# Allegro board Chamber.brd
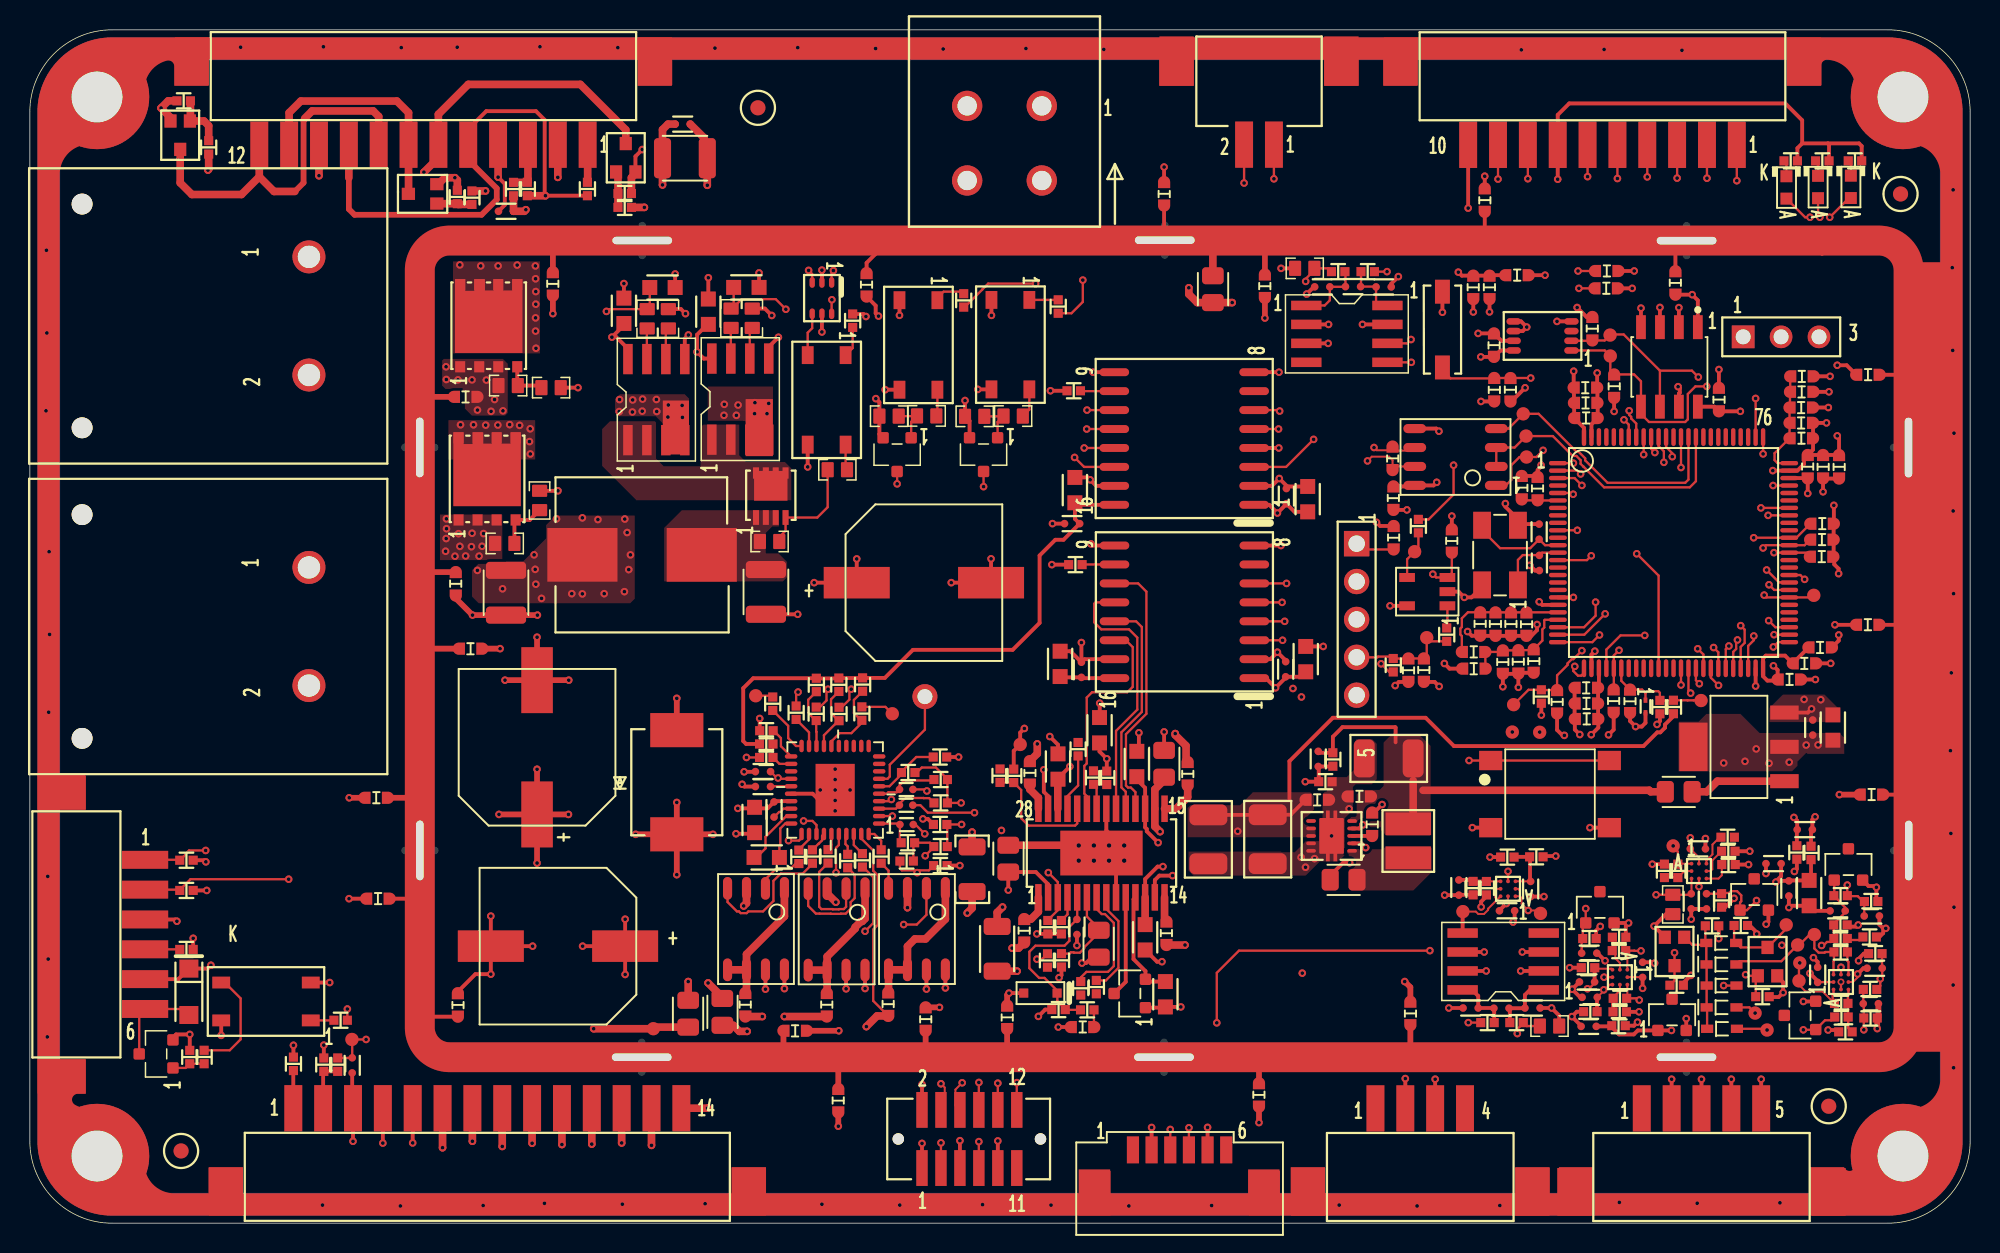
[diagram p0: board, top side]
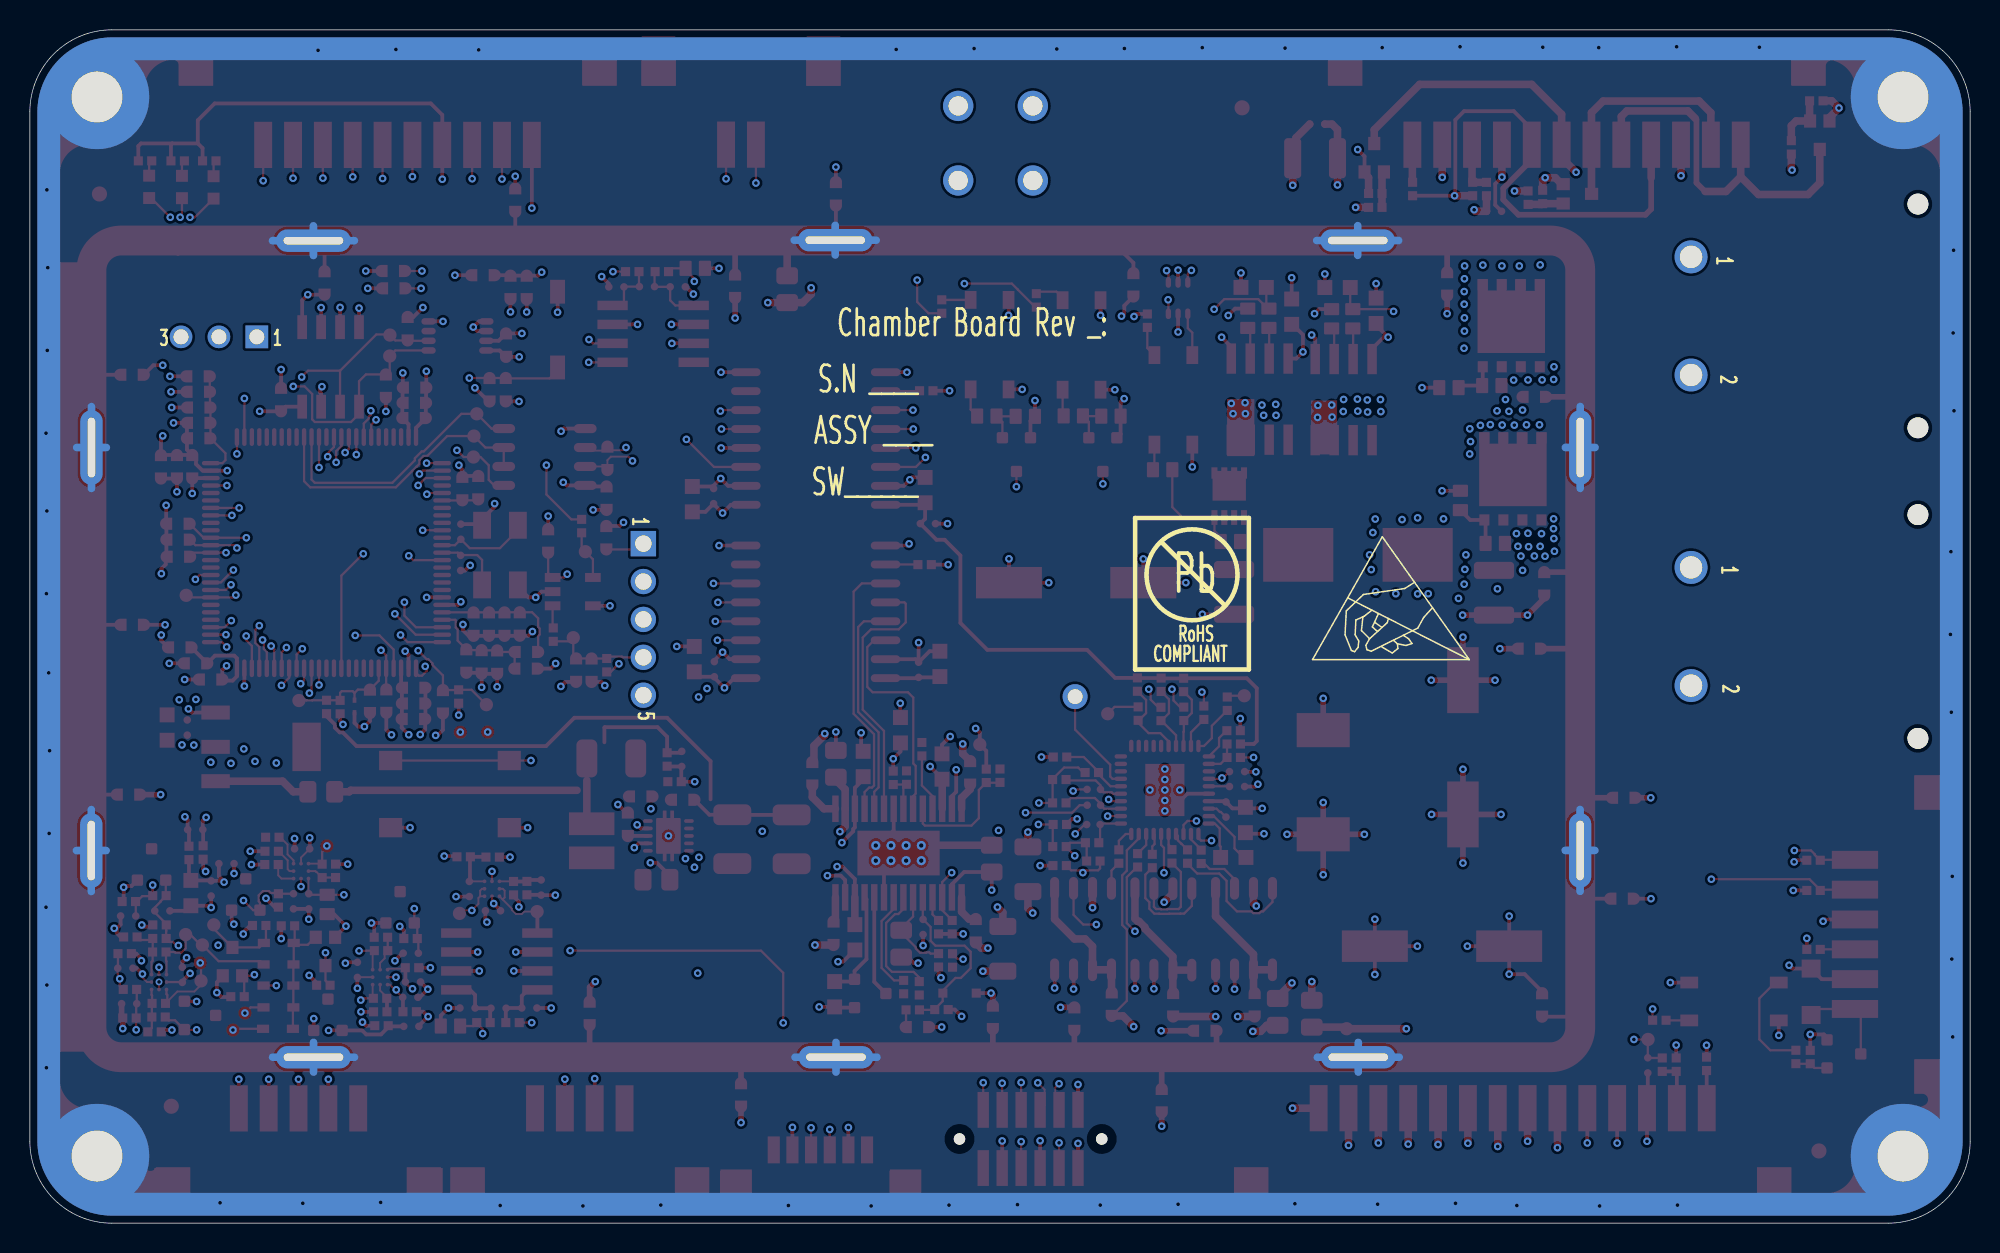
[diagram p1: board, bottom side, seen from below]

Outline 130 x 80 mm; copper layers: TOP, GND, SIG1, PWR, GND2, SIG2, GND3, BOTTOM. Coordinates in mm from the lower left corner of the outline.
Outline path: 0,74.5 arc(1.61,78.39) 5.5,80 124.5,80 arc(128.39,78.39) 130,74.5 130,5.5 arc(128.39,1.61) 124.5,0 5.5,0 arc(1.61,1.61) 0,5.5 0,74.5

## Design rules (mm)
constraint set DEFAULT: min track width 0.152
net group DP1: nets RS485A RS485B

## Placement (name value [footprint] x y rotation side)
C1  0.1uF  [CC_0402]  43.74 73.68 0 top
C2  10uF  [CC_1210]  43.89 71.39 0 top
C3  10nF  [SMD0603]  75.99 69.01 270 top
C4  10nF  [SMD0603]  97.48 68.58 270 top
C5  0.1uF  [CC_0402]  31.9 67.84 0 top
C6  10nF  [SMD0603]  110.25 63.03 90 top
C7  10nF  [SMD0603]  35.04 62.97 90 top
C8  10nF  [SMD0603]  56.06 62.91 90 top
C9  10nF  [SMD0603]  82.75 62.81 90 top
C10  0.47uF  [CC_0402]  88.65 62.79 180 top
C11  0.47uF  [CC_0402]  86.59 62.77 180 top
C12  0.47uF  [CC_0402]  90.7 62.77 180 top
C13  0.47uF  [CC_0603]  48.01 62.73 0 top
C14  1uF  [SMD0603]  96.71 62.73 90 top
C15  100n  [0603]  97.8 62.73 90 top
C16  0.47uF  [CC_0603]  42.38 62.73 0 top
C17  0.1uF  [CC_0603]  39.8 61.17 90 top
C18  0.1uF  [CC_0603]  45.46 61.1 90 top
C19  100n  [0603]  98.1 58.86 270 top
C20  10nF  [SMD0603]  123.15 56.88 0 top
C21  1uF  [SMD0603]  104.22 56.01 180 top
C22  10nF  [SMD0603]  29.2 55.39 180 top
C23  100n  [0603]  113.17 55.21 270 top
C24  100n  [0603]  104.24 54.99 180 top
C25  1uF  [SMD0603]  118.69 54.68 180 top
C26  10nF  [SMD0603]  104.26 53.98 0 top
C27  100n  [0603]  118.69 53.65 180 top
C28  10nF  [SMD0603]  118.69 52.62 0 top
C29  10nF  [SMD0603]  119.12 50.71 90 top
C30  100n  [0603]  120.14 50.71 270 top
C31  1uF  [SMD0603]  121.22 50.71 270 top
C32  100n  [0603]  99.96 49.31 270 top
C33  10nF  [SMD0603]  101.02 49.25 90 top
C34  10uF  [CC_0603]  70.02 49.14 90 top
C35  0.1uF  [CC_0402]  84.19 48.74 90 top
C36  100n  [0603]  91.36 48.6 90 top
C37  10uF  [CC_0603]  85.62 48.54 90 top
C38  0.1uF  [CC_0402]  69.83 46.9 180 top
C39  12pF  [CC_0402]  101.12 46.35 90 top
C40  12pF  [CC_0402]  101.14 44.26 270 top
C41  100UF  [EEE-1JA101P]  59.9 42.94 0 top
C42  10nF  [SMD0603]  28.54 42.86 90 top
C43  10uF  [CC_1210]  49.32 42.32 270 top
C44  10uF  [CC_1210]  31.9 42.26 270 top
C45  1uF  [SMD0603]  98.2 40.16 90 top
C46  100n  [0603]  99.24 40.16 90 top
C47  10nF  [SMD0603]  100.27 40.16 270 top
C48  10nF  [SMD0603]  123.14 40.11 0 top
C49  1uF  [SMD0603]  119.95 38.6 180 top
C50  10nF  [SMD0603]  29.53 38.51 180 top
C51  10uF  [CC_0603]  85.48 37.81 90 top
C52  10nF  [SMD0603]  100.76 37.69 270 top
C53  100n  [0603]  99.73 37.63 90 top
C54  1uF  [SMD0603]  98.69 37.61 90 top
C55  100n  [0603]  118.9 37.53 180 top
C56  10uF  [CC_0603]  69.03 37.49 90 top
C57  0.1uF  [CC_0402]  84.14 37.14 90 top
C58  0.1uF  [CC_0402]  70.45 37.1 90 top
C59  100n  [0603]  93.4 37.07 90 top
C60  10nF  [SMD0603]  117.89 36.45 0 top
C61  10nF  [SMD0603]  104.28 35.89 180 top
C62  100n  [0603]  106.12 35 90 top
C63  100n  [0603]  107.21 34.98 90 top
C64  1uF  [SMD0603]  104.29 34.84 0 top
C65  100n  [0603]  104.3 33.8 0 top
C66  0.1uF  [CC_0402]  119.45 33.23 270 top
C67  10uF  [CC_0603]  120.8 33.23 270 top
C68  10uF  [CC_0603]  71.67 33.05 90 top
C69  100UF  [EEE-1JA101P]  33.98 31.9 90 top
C70  0.1uF  [CC_0805]  76 30.79 90 top
C71  0.1uF  [CC_0603]  74.17 30.78 90 top
C72  0.1uF  [CC_0603]  68.88 30.61 90 top
C73  0.1uF  [CC_0402]  49.12 30.27 0 top
C74  0.1uF  [CC_0402]  49.12 29.27 0 top
C75  10nF  [SMD0603]  123.39 28.73 0 top
C76  10nF  [SMD0603]  23.21 28.52 0 top
C77  1uF  [CC_0402]  49.86 27.73 270 top
C78  0.1uF  [CC_0603]  48.56 27.03 270 top
C79  0.1uF  [CC_0402]  118.92 26.38 180 top
C80  0.1uF  [CC_0402]  111.76 25.09 0 top
C81  0.1uF  [CC_0603]  49.37 24.52 180 top
C82  0.1uF  [CC_0805]  65.55 24.44 90 top
C83  10nF  [CC_0402]  116.83 24.1 180 top
C84  0.1uF  [CC_0402]  95.74 22.5 270 top
C85  0.1uF  [CC_0402]  117.85 22.44 270 top
C86  0.1uF  [CC_0402]  100.55 22.4 270 top
C87  10uF  [CC_0603]  119.21 22.13 270 top
C88  10nF  [SMD0603]  23.32 21.75 0 top
C89  0.1uF  [CC_0402]  111.31 21.58 270 top
C90  0.1uF  [CC_0402]  112.34 21.58 270 top
C91  0.1uF  [CC_0402]  98.97 20.94 0 top
C92  0.1uF  [CC_0402]  121.12 20.94 180 top
C93  0.1uF  [CC_0402]  123.41 20.59 0 top
C94  3300pF  [CC_0402]  70.15 19.86 270 top
C95  0.1uF  [CC_0603]  74.72 19.16 270 top
C96  47uF  [CC_0805]  71.62 18.74 270 top
C97  100UF  [EEE-1JA101P]  35.38 18.57 180 top
C98  10uF  [CC_1206]  64.81 18.39 270 top
C99  0.1uF  [CC_0402]  104.48 18.1 0 top
C100  0.1uF  [CC_0402]  123.6 17.09 180 top
C101  0.1uF  [CC_0402]  108.05 16.98 90 top
C102  0.1uF  [CC_0402]  119.78 16.65 90 top
C103  0.1uF  [CC_0402]  104.33 16.17 180 top
C104  0.22uF  [CC_0603]  76.08 15.35 270 top
C105  0.1uF  [CC_0402]  104.51 15.14 180 top
C106  0.1uF  [CC_0402]  123.34 14.71 0 top
C107  10nF  [SMD0603]  28.68 14.63 270 top
C108  0.47uF  [CC_0402]  96.53 14.42 0 top
C109  0.47uF  [CC_0402]  100.68 14.42 0 top
C110  0.47uF  [CC_0402]  98.6 14.41 0 top
C111  10nF  [SMD0603]  92.49 14.06 270 top
C112  10nF  [SMD0603]  65.48 13.8 270 top
C113  10nF  [SMD0603]  60.02 13.68 270 top
C114  0.1uF  [CC_0402]  104.44 13.19 180 top
C115  10nF  [SMD0603]  51.28 12.9 180 top
C116  0.1uF  [CC_0402]  21.6 10.58 90 top
C117  10nF  [SMD0603]  82.35 8.6 90 top
C118  10nF  [SMD0603]  54.17 8.21 90 top
CBIAS1  10nF  [SMD0603]  89.07 28.61 0 top
CBOOT1  100nF  [0805]  88.02 23.03 0 top
CFF1  47pF  [CC_0402]  86.32 31.12 270 top
CIN1  4.7uF  [1210]  78.96 25.73 270 top
CIN_1  4.7uF  [1210]  82.94 25.74 270 top
CINX1  100nF  [0603]  86.26 28.38 180 top
COUT1  22uF  [1210]  91.04 31.16 180 top
CVCC1  1uF  [0603]  89.93 26.74 270 top
D1  LO L29K-H2L1-24-Z  [LED0603]  122.01 69.47 270 top
D2  LO L29K-H2L1-24-Z  [LED0603]  119.81 69.46 270 top
D3  LO L29K-H2L1-24-Z  [LED0603]  117.69 69.44 270 top
D4  ESD9L3.3ST5G  [SOD923]  108.25 34.64 270 top
D5  SZ1.5SMC33AT3G  [DO-214AB]  43.35 29.56 90 top
D6  LM4040AEM3-3.0+T  [SOT23-3]  121.84 24.05 0 top
D7  LM4040AEM3-3.0+T  [SOT23-3]  115.53 22.03 0 top
D8  LM4040AEM3-3.0+T  [SOT23-3]  105.19 21.18 0 top
D9  1N4148WT  [SOT523F]  113.32 18.79 180 top
D10  1N4148WT  [SOT523F]  113.34 17.34 180 top
D11  1N4148WT  [SOT523F]  113.34 15.93 180 top
D12  MBR2H200SFT3G  [SOD-123F]  10.66 15.51 270 top
D13  MM3Z3V0ST1G  [SOD323]  67.71 15.42 180 top
D14  SBAV99LT3G  [SOT-23-3]  73.7 15.4 90 top
D15  1N4148WT  [SOT523F]  113.34 14.47 180 top
D16  LM4040AEM3-3.0+T  [SOT23-3]  110.03 13.97 0 top
D17  LM4040AEM3-3.0+T  [SOT23-3]  118.6 13.93 90 top
D18  1N4148WT  [SOT523F]  113.38 13.03 180 top
FED1  FEDUCIAL  [FED]  48.78 74.77 0 top
FED2  FEDUCIAL  [FED]  10.13 4.84 0 top
FED3  FEDUCIAL  [FED]  120.53 7.84 0 top
FED4  FEDUCIAL  [FED]  125.34 69 0 top
ISO1  LTV-356T  [4-SOP]  65.7 58.89 270 top
ISO2  LTV-356T  [4-SOP]  59.54 58.87 270 top
ISO3  LTV-356T  [4-SOP]  53.39 55.19 270 top
ISO4  LTV-356T  [4-SOP]  15.82 14.86 180 top
J1  HEADER 12  [DF3EA-12P-2H-51]  26.37 76.75 0 top
J2  HEADER 10  [DF3EA-10P-2H51]  103.37 76.74 0 top
J3  HEADER 5  [DF3EA-5P-2H51]  112 3.24 180 top
J4  TC in  [DF3EA-4P-2H51]  93.16 3.25 180 top
J5  TC_OUT  [DF3EA-2P-2H51]  82.35 76.75 0 top
J6  DF22-2P-7.92DS(36)  [DF22-2P-7_92DS36]  7.85 40 90 top
J7  Heater_out  [2834098-1]  67.8 74.9 180 top
J8  Heater_in  [DF22L-2P-7_92DS06]  7.85 60.82 90 top
J9  -  [20021221-00012C4LF]  62.95 5.64 0 top
J10  -  [61300311121]  114.79 59.42 0 top
J11  -  [61300511121]  88.89 45.55 0 top
J20  -  [53261-0671]  76.41 2.11 0 top
J21  DF3EA-6P-2H(51)  [DF3EA-6P-2H51]  3.27 19.36 90 top
J22  DF3EA-14P-2H(51)  [DF3EA-14P-2H51]  30.65 3.26 180 top
L1  600ohm@100MHz  [0603]  99.64 63.55 0 top
L2  -  [SPM10040XT-R18M]  41.02 44.8 0 top
L3  600ohm@100MHz  [0603]  96.75 37.18 180 top
L4  BLM18SG331TN1D  [BD_0603]  67 30.19 270 top
L5  BLM18SG331TN1D  [BD_0603]  77.57 30.13 270 top
L6  BLM15AG601SN1D  [BD_0402]  58.72 29.08 0 top
L7  BLM15AG601SN1D  [BD_0402]  58.71 28.02 0 top
L8  BLM15AG601SN1D  [BD_0402]  58.74 26.72 0 top
L9  4.7uH  [ME3220]  92.36 25.63 90 top
L10  BK1005HM601-T  [0402]  119.34 24.82 90 top
L11  BLM18SG331TN1D  [BD_0603]  66.62 19.6 90 top
L12  BLM18SG331TN1D  [BD_0603]  76.15 19.43 90 top
L13  BLM18SG331TN1D  [BD_0603]  57.51 14.68 90 top
L14  BLM18SG331TN1D  [BD_0603]  47.94 14.64 90 top
L15  BLM18SG331TN1D  [BD_0603]  53.4 14.64 90 top
L16  BLM18HG601SN1D  [BD_0603]  70.53 13.15 0 top
MH1  Mounting H  [THP3_4]  4.5 75.5 0 top
MH2  Mounting H  [THP3_4]  125.5 75.5 0 top
MH3  M HOLE2  [OVAL4X0_5]  76.04 65.9 0 top
MH4  M HOLE2  [OVAL4X0_5]  41.03 65.88 0 top
MH5  M HOLE2  [OVAL4X0_5]  111 65.87 0 top
MH6  M HOLE2  [OVAL4X0_5]  26.12 52 90 top
MH7  M HOLE2  [OVAL4X0_5]  125.87 52 90 top
MH8  M HOLE2  [OVAL4X0_5]  26.13 24.99 90 top
MH9  M HOLE2  [OVAL4X0_5]  125.88 24.98 90 top
MH10  M HOLE2  [OVAL4X0_5]  41 11.12 0 top
MH11  M HOLE2  [OVAL4X0_5]  75.99 11.12 0 top
MH12  M HOLE2  [OVAL4X0_5]  110.99 11.12 0 top
MH13  Mounting H  [THP3_4]  4.5 4.5 0 top
MH14  Mounting H  [THP3_4]  125.5 4.5 0 top
NOREF  -  []  0 0 0 top
NOREF#2  -  []  27.23 0 90 top
NOREF#3  -  []  0 15.84 0 top
NOREF#4  -  []  -10.16 -10.07 90 top
NOREF#5  -  []  -10.16 -10.07 0 top
NOREF#6  -  []  0 0 90 top
NOREF#7  -  []  52.14 43.46 180 bottom
NOREF#8  -  []  44.06 37.78 180 bottom
Q1  BSS123W  [SOT323]  10.07 72.94 180 top
Q2  BSS123W  [SOT323]  39.93 71.42 0 top
Q3  BSS123W  [SOT323]  26.31 69 90 top
Q4  CSD18504Q5A  [8-VSONP]  30.74 60.16 90 top
Q5  ZXMP6A13F  [SOT23]  63.9 51.52 180 top
Q6  ZXMP6A13F  [SOT23]  58.11 51.52 180 top
Q7  CSD18504Q5A  [8-VSONP]  30.63 49.9 90 top
Q8  SISS27DN-T1-GE3  [8-POWERVDFN]  49.64 48.8 90 top
Q9  BSS123W-7-F  [SOT323]  110.19 18.21 180 top
Q10  BSS123W-7-F  [SOT323]  116.43 17.53 0 top
Q11  IRLML2803TRPBF  [SOT23]  8.46 11.35 90 top
R1  10k  [CR_0402]  10.31 75.24 180 top
R2  470  [CR_0402]  11.98 72.12 90 top
R3  590  [CR_0402]  117.98 71.22 180 top
R4  590  [CR_0402]  122.28 71.22 180 top
R5  590  [CR_0402]  120.1 71.21 180 top
R6  4.7k  [CR_0402]  33.33 69.33 90 top
R7  332  [CR_0402]  37.36 69.33 90 top
R8  470  [CR_0402]  32.41 69.32 270 top
R9  10k  [CR_0402]  39.86 69.03 0 top
R10  10k  [CR_0402]  28.64 68.8 90 top
R11  470  [CR_0402]  29.62 68.75 270 top
R12  470  [CR_0402]  39.86 68.1 180 top
R13  1M  [CR_0603]  85.42 64.01 180 top
R14  10K  [SMD0603]  105.65 63.83 0 top
R15  10k  [CR_0402]  87.66 63.79 0 top
R16  10k  [CR_0402]  89.64 63.79 180 top
R17  10K  [SMD0603]  105.62 62.67 0 top
R18  0R  [CR_0805]  79.26 62.61 90 top
R19  422  [CR_0402]  62.57 61.86 90 top
R20  422  [CR_0402]  68.9 61.45 90 top
R21  1K  [CR_0603]  46.98 60.66 270 top
R22  10K  [CR_0603]  48.4 60.66 270 top
R23  1K  [CR_0603]  41.36 60.63 270 top
R24  10K  [CR_0603]  42.78 60.63 270 top
R25  422  [CR_0402]  55.13 60.5 90 top
R26  10K  [SMD0603]  104.69 59.96 90 top
R27  0R  [0603]  118.73 56.77 180 top
R28  4.7K  [CR_0603]  32.05 56.15 180 top
R29  10K  [SMD0603]  106.15 56.11 270 top
R30  4.7K  [CR_0603]  34.92 56.01 180 top
R31  40.2K  [SMD0603]  98.12 55.87 270 top
R32  0R  [0603]  99.2 55.87 90 top
R33  4.7k  [CR_0402]  69.94 55.8 180 top
R34  0R  [0603]  118.72 55.73 180 top
R35  4.7K  [CR_0603]  60.09 54.12 0 top
R36  4.7K  [CR_0603]  65.88 54.11 0 top
R37  4.7K  [CR_0603]  57.57 54.1 0 top
R38  4.7K  [CR_0603]  63.3 54.09 0 top
R39  120  [SMD0603]  91.3 51.27 270 top
R40  4.7K  [CR_0603]  54.1 50.51 0 top
R41  4.7K  [CR_0603]  34.15 48.45 270 top
R42  10K  [SMD0603]  120.08 46.89 0 top
R43  0R  [CR_0402]  93.03 46.73 90 top
R44  75R  [SMD0603]  91.38 45.95 90 top
R45  10K  [SMD0603]  120.07 45.82 0 top
R46  10K  [SMD0603]  95.27 45.73 90 top
R47  4.7K  [CR_0603]  49.56 45.7 0 top
R48  4.7K  [CR_0603]  31.82 45.57 180 top
R49  10K  [SMD0603]  120.05 44.68 0 top
R50  4.7k  [CR_0402]  70.05 44.15 180 top
R51  0R  [0603]  97.18 40.17 90 top
R52  470  [CR_0402]  94.93 39.45 270 top
R53  0R  [0603]  96.73 38.29 0 top
R54  470  [CR_0402]  91.35 37.4 90 top
R55  10K  [SMD0603]  92.36 37.07 270 top
R56  100k  [CR_0402]  55.79 36.11 90 top
R57  100k  [CR_0402]  54.2 36.09 90 top
R58  100k  [CR_0402]  52.69 36.08 90 top
R59  20k  [CR_0402]  101.27 35.31 270 top
R60  10K  [SMD0603]  102.32 34.95 270 top
R61  0R  [CR_0402]  49.77 34.82 90 top
R62  40.2k  [CR_0402]  110.12 34.6 90 top
R63  4.7k  [CR_0402]  109.21 34.6 270 top
R64  0R  [CR_0402]  51.34 34.22 90 top
R65  100R  [CR_0402]  55.75 34.16 270 top
R66  100R  [CR_0402]  52.68 34.15 270 top
R67  100R  [CR_0402]  54.21 34.14 270 top
R68  0R  [CR_0402]  49.35 33.01 180 top
R69  100k  [CR_0402]  49.34 32.12 180 top
R70  0R  [CR_0402]  70.23 31.77 270 top
R71  4.7k  [CR_0402]  60.98 31.25 0 top
R72  0R  [CR_0402]  49.34 31.22 180 top
R73  4.7k  [CR_0402]  58.85 30.21 0 top
R74  470R  [CR_0402]  65 30 270 top
R75  100k  [CR_0402]  65.92 29.99 90 top
R76  0R  [CR_0402]  71.26 29.87 270 top
R77  100k  [CR_0402]  72.15 29.86 90 top
R78  4.7k  [CR_0402]  61.03 29.74 0 top
R79  0R  [CR_0805]  110.47 28.92 0 top
R80  4.7k  [CR_0402]  61.03 28.17 0 top
R81  4.7k  [CR_0402]  60.99 26.73 180 top
R82  10k  [CR_0402]  113.75 25.87 0 top
R83  4.7k  [CR_0402]  58.83 25.5 0 top
R84  4.7k  [CR_0402]  61.02 25.25 180 top
R85  10k  [CR_0402]  113.8 24.94 0 top
R86  0R  [CR_0402]  118.39 24.85 90 top
R87  280R  [CR_0402]  53.48 24.59 270 top
R88  0R  [CR_0402]  57.04 24.58 90 top
R89  0R  [CR_0402]  52.43 24.58 90 top
R90  280R  [CR_0402]  51.52 24.56 270 top
R91  1.3k  [CR_0402]  100.93 24.56 0 top
R92  4.42k  [CR_0402]  98.99 24.54 0 top
R93  10k  [CR_0402]  10.49 24.33 180 top
R94  280R  [CR_0402]  55.78 24.32 270 top
R95  0R  [CR_0402]  54.8 24.28 90 top
R96  4.7k  [CR_0402]  58.75 24.28 0 top
R97  10k  [CR_0402]  113.81 24.04 180 top
R98  4.7k  [CR_0402]  61 23.97 0 top
R99  0.005R  [CR_1206]  63.13 23.73 90 top
R100  1M NC  [CR_0402]  109.52 23.62 270 top
R101  0R  [CR_0402]  110.42 23.62 90 top
R102  1.3k  [CR_0402]  96.7 22.46 270 top
R103  4.42k  [CR_0402]  97.59 22.46 90 top
R104  10k  [CR_0402]  10.49 22.31 180 top
R105  NC  [CR_0402]  121.32 21.96 0 top
R106  590  [CR_0402]  113.35 21.64 90 top
R107  10k  [CR_0402]  123.37 21.56 0 top
R108  4.99K  [CR_0603]  110.08 21.37 270 top
R109  590  [CR_0402]  121.31 19.99 180 top
R110  10k  [CR_0402]  114.63 19.96 180 top
R111  10k  [CR_0402]  112.71 19.93 0 top
R112  100k  [CR_0402]  68.2 19.84 270 top
R113  0R  [CR_0402]  69.12 19.84 90 top
R114  56k  [CR_0402]  123.27 19.19 0 top
R115  1M NC  [CR_0402]  106.48 19.17 180 top
R116  24k  [CR_0402]  121.32 19.09 0 top
R117  590  [CR_0402]  104.49 19.08 180 top
R118  4.7k  [CR_0402]  10.49 18.35 180 top
R119  0R  [CR_0402]  106.47 18.27 0 top
R120  680k  [CR_0402]  121.33 18.18 180 top
R121  590  [CR_0402]  123.65 18.07 0 top
R122  0R  [CR_0402]  69.12 17.62 270 top
R123  0R  [CR_0402]  68.18 17.61 90 top
R124  10k  [CR_0402]  104.4 17.12 180 top
R125  10k  [CR_0402]  110.34 15.95 180 top
R126  0R  [CR_0402]  71.46 15.83 90 top
R127  0R  [CR_0402]  70.41 15.75 90 top
R128  NC  [CR_0402]  123.29 15.67 180 top
R129  10k  [CR_0402]  116.09 15.18 180 top
R130  0R  [CR_0402]  106.54 15.07 0 top
R131  680k  [CR_0402]  121.36 14.73 180 top
R132  10k  [CR_0402]  68.92 14.32 180 top
R133  150k  [CR_0402]  70.85 14.3 180 top
R134  10k  [CR_0402]  104.55 14.18 180 top
R135  1M NC  [CR_0402]  106.52 14.17 180 top
R136  180R  [CR_0805]  46.4 14.16 90 top
R137  2K  [CR_0805]  44.11 14.04 270 top
R138  24k  [CR_0402]  121.38 13.82 0 top
R139  10k  [CR_0402]  123.32 13.75 0 top
R140  422  [CR_0402]  20.82 13.6 180 top
R141  10k  [CR_0402]  97.66 13.44 0 top
R142  10k  [CR_0402]  99.61 13.44 180 top
R143  590  [CR_0402]  106.44 13.24 180 top
R144  1M  [CR_0603]  101.82 13.22 0 top
R145  56k  [CR_0402]  121.64 12.82 180 top
R146  4.7k  [CR_0402]  11.68 11.14 270 top
R147  4.7k  [CR_0402]  10.71 11.14 90 top
R148  332  [CR_0402]  17.66 10.68 270 top
R149  4.7k  [CR_0402]  19.7 10.62 270 top
R150  470  [CR_0402]  20.63 10.62 90 top
RFBB1  37.4k  [0402]  86.8 29.6 0 top
RFBT1  100k  [0402]  87.3 31.08 270 top
SW1  -  [CHS-01TA]  94.64 59.91 0 top
SW2  -  [PTS645SM43SMTR92]  101.85 28.77 0 top
TP1  TEST POINT  [35MIL_SMT]  105.87 59.54 0 top
TP2  TEST POINT  [35MIL_SMT]  105.89 58.13 0 top
TP3  TEST POINT  [35MIL_SMT]  100.06 54.26 270 top
TP4  TEST POINT  [35MIL_SMT]  100.25 52.77 270 top
TP5  TEST POINT  [35MIL_SMT]  100.28 51.36 270 top
TP6  TEST POINT  [35MIL_SMT]  92.78 45.02 0 top
TP7  TEST POINT  [35MIL_SMT]  119.52 42.09 0 top
TP8  TEST POINT  [35MIL_SMT]  93.59 39.25 0 top
TP9  TEST POINT  [35MIL_SMT]  48.63 35.36 0 top
TP10  TP TH 1MM  [CR_1MM]  59.97 35.3 0 top
TP11  TEST POINT  [35MIL_SMT]  111.97 35.04 0 top
TP12  TEST POINT  [35MIL_SMT]  99.41 34.76 0 top
TP13  TEST POINT  [35MIL_SMT]  57.78 34.15 0 top
TP14  TEST POINT  [35MIL_SMT]  99.32 32.92 0 top
TP15  TEST POINT  [35MIL_SMT]  101.16 32.91 0 top
TP16  TEST POINT  [35MIL_SMT]  66.35 32.09 0 top
TP17  TEST POINT  [35MIL_SMT]  110.1 25.29 0 top
TP18  TEST POINT  [35MIL_SMT]  96.01 20.89 0 top
TP19  TEST POINT  [35MIL_SMT]  101.21 20.77 0 top
TP20  TEST POINT  [35MIL_SMT]  117.68 20 0 top
TP21  TEST POINT  [35MIL_SMT]  119.56 19.35 0 top
TP22  TEST POINT  [35MIL_SMT]  118.44 18.65 0 top
TP23  TEST POINT  [35MIL_SMT]  118.58 17.45 0 top
TP24  TEST POINT  [35MIL_SMT]  118.53 16.24 0 top
TP25  TEST POINT  [35MIL_SMT]  115.59 14.08 0 top
TP26  TEST POINT  [35MIL_SMT]  41.78 13.04 0 top
TP27  TEST POINT  [35MIL_SMT]  116.39 12.95 0 top
TP28  TEST POINT  [35MIL_SMT]  21.58 12.32 0 top
U1  SN74LVC1G10DCKR  [SC-70-6]  53.07 62.01 180 top
U2  AD8495CRMZ-R7  [SO8]  88.24 59.62 0 top
U3  LM75BDP,118  [TSSOP-8]  101.35 59.48 180 top
U4  FT24C64A-USG-T  [SOP-8]  109.85 57.4 180 top
U5  ACS722LLCTR-10AU-T  [SO8]  47.6 55.24 90 top
U6  ACS722LLCTR-10AU-T  [SO8]  41.98 55.21 90 top
U7  ISOW7842  [16-SOICW]  77.34 52.6 90 top
U8  ST1480  [8-SOIC]  95.52 51.36 180 top
U9  STM32L073  [LQFP100]  110.13 44.95 0 top
U10  ADM6320CZ29ARJZ-R7  [SOT23-5]  93.63 42.34 0 top
U11  ISOW7841  [SOIC16W]  77.36 40.98 90 top
U12  MCP1826S-3302E/DB  [SOT223-3]  114.51 31.93 90 top
U13  DRV8307RHAR  [40-VQFN_6X6]  53.95 29.04 180 top
U14  LM53601AQDSXRQ1  [DSX0010A]  87.22 25.96 180 top
U15  L6470H  [28-TSSOP]  71.8 24.81 0 top
U16  LM2904ITPX/NOPB  [8-DSBGA]  111.83 23.6 0 top
U17  LM2904ITPX/NOPB  [8-DSBGA]  99.04 22.42 180 top
U18  CSD88537ND  [SO-8]  48.65 19.72 270 top
U19  CSD88537ND  [SO-8]  59.44 19.72 270 top
U20  CSD88537ND  [SO-8]  54.05 19.7 270 top
U21  AD8495CRMZ-R7  [SO8]  98.71 17.54 180 top
U22  LM2904ITPX/NOPB  [8-DSBGA]  106.53 16.49 270 top
U23  LM2904ITPX/NOPB  [8-DSBGA]  121.35 16.16 90 top
Y1  ABM3B-20.000MHZ-B2-T  [ABM3B-20_000MHZ-B2-T]  98.5 44.79 90 top

## Library data of the parts
C1 C2 C10-C13 C16-C18 C34 C35 C37-C40 C43 C44 C51 C56-C58 C66 C67 C79 C80 C83-C87 C89-C93 C99-C103 C105 C106 C108-C110 C114 CFF1 = C_0603
C3 C4 C6-C9 C20 C22 C26 C28 C29 C33 C42 C47 C48 C50 C52 C60 C61 C75 C76 C88 C107 C111-C113 C115 C117 C118 = CAP NP
C5 C73 C74 C77 C78 C81 C116 = C_0603: room: BLDC_SPARE
C14 C21 C25 C31 C45 C49 C54 C64 = capacitor
C15 C19 C23 C24 C27 C30 C32 C36 C46 C53 C55 C59 C62 C63 C65 = CAP NP_0
C41 = C: room: Step_Dri_Linear
C68 C70-C72 C82 C94-C96 C98 C104 = C_0603: room: Step_Dri_Linear
C69 C97 = C: room: BLDC_SPARE
CBIAS1 = GRM033R61A103KA01D
CBOOT1 = C0805C104K5RACTU
CIN1 CIN_1 = GRM32ER71H475KA88L
CINX1 = C0603C104K5RACTU
COUT1 = GRM32ER61C226ME20L
CVCC1 = C0603C105Z8VACTU
D1-D3 = DIO_LED_B_0
D4 = DIODE TS_0
D5 = DIODE SCHOTTKY_1: room: BLDC_SPARE
D6-D8 D16 D17 = UT4020_1
D9-D11 D15 D18 = 1N4148WT
D12 = 120NQ045_0
D13 = MM3Z3V3ST1G: room: MCU
D14 = BAV99L_0: room: Step_Dri_Linear
FED1-FED4 = FEDUCIAL
ISO1-ISO4 = OPTO ISOLATOR-A_0
J1 = HEADER 12
J2 = HEADER 10
J3 = HEADER 5
J4 = HEADER 4
J5-J8 = HEADER 2
J9 = HEADER 6X2
J10 = HEADER 3/SM
J11 = CON5
J20 J21 = HEADER 6
J22 = CONN FLEX 14
L1 L3 = BEAD_0
L2 = INDUCTOR
L4-L8 L10-L15 = BEAD
L9 = ME3220-472MLB
L16 = BEAD: room: TEMP_SNS
MH1 MH2 MH13 MH14 = M HOLE1_0
MH3-MH12 = M HOLE2_0
Q1-Q3 Q9 Q10 = BSS123W-7-F
Q4 Q7 = IRF7201/SO_1
Q5 Q6 = ZVP4424/TO_0
Q8 = DI9435/SO_1
Q11 = VN0610LL_0
R1-R13 R15 R16 R18-R25 R28 R30 R33 R35-R38 R40 R41 R43 R47 R48 R50 R52 R54 R59 R62 R63 R71 R73 R78-R86 R91-R93 R96-R98 R100-R111 R114-R121 R124 R125 R128-R131 R134-R150 = Resistor_Small
R14 R17 R26 R27 R29 R31 R32 R34 R39 R42 R44-R46 R49 R51 R53 R55 R60 = R
R56-R58 R61 R64-R69 R72 R87-R90 R94 R95 R99 = Resistor_Small: room: BLDC_SPARE
R70 R74-R77 R112 R113 R122 R123 R126 R127 R132 R133 = Resistor_Small: room: Step_Dri_Linear
RFBB1 = CRCW040237K4FKED
RFBT1 = CRCW0402100KFKED
SW1 = SW SLIDE-SPST
SW2 = SW_TC_SPST
TP1-TP15 TP17-TP28 = TP_35MIL_SMT: room: BLDC_SPARE
TP16 = TP_35MIL_SMT: room: Step_Dri_Linear
U1 = SN74LVC1G10DCKR
U2 U21 = AD8495CRMZ-R7
U3 = LM75BDP,118
U4 = FT24C64A-USG-T
U5 U6 = ACS723LLCTR-10AU-T2_0
U7 = ISOW7842_0
U8 = LTC1485_0
U9 = STM32L073_2
U10 = ADM6320CZ29ARJZ-R7_1
U11 = ISOW7841_0
U12 = TCL1117/DD_3
U13 = STSPIN32F0_27: room: BLDC_SPARE
U14 = LM53601AQDSXRQ1_0
U15 = L6470H_13: room: Step_Dri_Linear
U16 U17 U22 U23 = LM387_0
U18-U20 = DRV8806_4: room: BLDC_SPARE
Y1 = CRYSTAL1-4/SM_0

## Footprints (pads in the part's own frame, mm; a bottom-side part is the same pattern mirrored in y, then rotated)
4-SOP
  rect 1.194x0.787 smd: 1(-3,1.27) 2(-3,-1.27) 3(3,-1.27) 4(3,1.27)
8-DSBGA
  round 0.254 smd: A1(-0.5,0.5) A2(0,0.5) A3(0.5,0.5) B1(-0.5,0) B3(0.5,0) C1(-0.5,-0.5) C2(0,-0.5) C3(0.5,-0.5)
8-POWERVDFN
  rect 0.991x0.406 smd: 1(-1.492,0.991) 2(-1.492,0.33) 3(-1.492,-0.33) 4(-1.492,-0.991)
  rect 0.762x0.406 smd: 5(1.492,-0.991) 6(1.492,-0.33) 7(1.492,0.33) 8(1.492,0.991)
8-SOIC
  oval 1.524x0.61 smd: 1(-2.731,1.905) 2(-2.731,0.635) 3(-2.731,-0.635) 4(-2.731,-1.905) 5(2.731,-1.905) 6(2.731,-0.635) 7(2.731,0.635) 8(2.731,1.905)
8-VSONP
  rect 0.75x0.675 smd: 1(-2.752,1.913) 2(-2.752,0.637) 3(-2.752,-0.637) 4(-2.752,-1.913) 5(2.752,-1.913) 6(2.752,-0.637) 7(2.752,0.637) 8(2.752,1.913)
16-SOICW
  oval 0.53x1.98 smd: 1(-4.445,-4.685) 2(-3.175,-4.685) 3(-1.905,-4.685) 4(-0.635,-4.685) 5(0.635,-4.685) 6(1.905,-4.685) 7(3.175,-4.685) 8(4.445,-4.685) 9(4.445,4.685) 10(3.175,4.685) 11(1.905,4.685) 12(0.635,4.685) 13(-0.635,4.685) 14(-1.905,4.685) 15(-3.175,4.685) 16(-4.445,4.685)
28-TSSOP
  rect 0.432x1.778 smd: 1(-4.227,-2.97) 2(-3.576,-2.97) 3(-2.926,-2.97) 4(-2.276,-2.97) 5(-1.626,-2.97) 6(-0.975,-2.97) 7(-0.325,-2.97) 8(0.325,-2.97) 9(0.975,-2.97) 10(1.626,-2.97) 11(2.276,-2.97) 12(2.926,-2.97) 13(3.576,-2.97) 14(4.227,-2.97) 15(4.227,2.97) 16(3.576,2.97) 17(2.926,2.97) 18(2.276,2.97) 19(1.626,2.97) 20(0.975,2.97) 21(0.325,2.97) 22(-0.325,2.97) 23(-0.975,2.97) 24(-1.626,2.97) 25(-2.276,2.97) 26(-2.926,2.97) 27(-3.576,2.97) 28(-4.227,2.97)
  rect 5.512x2.997 smd: 29(0,0)
35MIL_SMT
  round 0.889 smd: 1(0,0)
40-VQFN_6X6
  oval 0.838x0.292 smd: 1(-2.95,2.25) 2(-2.95,1.75) 3(-2.95,1.25) 4(-2.95,0.75) 5(-2.95,0.25) 6(-2.95,-0.25) 7(-2.95,-0.75) 8(-2.95,-1.25) 9(-2.95,-1.75) 10(-2.95,-2.25) 21(2.95,-2.25) 22(2.95,-1.75) 23(2.95,-1.25) 24(2.95,-0.75) 25(2.95,-0.25) 26(2.95,0.25) 27(2.95,0.75) 28(2.95,1.25) 29(2.95,1.75) 30(2.95,2.25)
  oval 0.292x0.838 smd: 11(-2.25,-2.95) 12(-1.75,-2.95) 13(-1.25,-2.95) 14(-0.75,-2.95) 15(-0.25,-2.95) 16(0.25,-2.95) 17(0.75,-2.95) 18(1.25,-2.95) 19(1.75,-2.95) 20(2.25,-2.95) 31(2.25,2.95) 32(1.75,2.95) 33(1.25,2.95) 34(0.75,2.95) 35(0.25,2.95) 36(-0.25,2.95) 37(-0.75,2.95) 38(-1.25,2.95) 39(-1.75,2.95) 40(-2.25,2.95)
  rect 2.62x3.5 smd: 41(0,0)
0402
  rect 0.61x0.61 smd: 1(-0.45,0) 2(0.45,0)
0603
  custom 0.813x0.813 smd: 1(0.787,0) 2(-0.787,0)
0805
  custom 1.143x1.448 smd: 1(-0.899,0) 2(0.899,0)
1210
  custom 1.397x2.54 smd: 1(-1.638,0) 2(1.638,0)
53261-0671
  rect 2.1x3 smd: (-5.05,-0.1) (6.3,-0.1)
  rect 0.813x1.803 smd: 1(-2.5,2.8) 2(-1.25,2.8) 3(0,2.8) 4(1.25,2.8) 5(2.5,2.8) 6(3.75,2.8)
2834098-1
  round 2.032 hole 1.295: (0,5) (5,5) 1(0,0) 2(5,0)
20021221-00012C4LF
  round 0.762 hole 1.016 unplated: (-4.765,0) (4.765,0)
  rect 0.762x2.4 smd: 1(-3.175,-1.95) 2(-3.175,1.95) 3(-1.905,-1.95) 4(-1.905,1.95) 5(-0.635,-1.95) 6(-0.635,1.95) 7(0.635,-1.95) 8(0.635,1.95) 9(1.905,-1.95) 10(1.905,1.95) 11(3.175,-1.95) 12(3.175,1.95)
61300311121
  rect 1.524x1.524 hole 1: 1(0,0)
  round 1.52 hole 1: 2(2.54,0) 3(5.08,0)
61300511121
  rect 1.702x1.702 hole 1.1: 1(0,0)
  round 1.7 hole 1.1: 2(0,-2.54) 3(0,-5.08) 4(0,-7.62) 5(0,-10.16)
ABM3B-20_000MHZ-B2-T
  rect 1.803x1.194 smd: 1(-2,-1.2) 2(2,-1.2) 3(2,1.2) 4(-2,1.2)
BD_0402
  round 0.508 smd: 1(-0.45,0) 2(0.45,0)
BD_0603
  custom 0.813x0.813 smd: 1(0.787,0) 2(-0.787,0)
CC_0402
  round 0.508 smd: 1(-0.508,0) 2(0.508,0)
CC_0603
  rect 1x1 smd: 1(-0.85,0) 2(0.85,0)
CC_0805
  custom 1.143x1.448 smd: 1(-0.899,0) 2(0.899,0)
CC_1206
  custom 1.143x1.803 smd: 1(-1.499,0) 2(1.499,0)
CC_1210
  custom 1.143x2.692 smd: 1(-1.5,0) 2(1.5,0)
CHS-01TA
  rect 1x1.6 smd: 1(0,2.54) 2(0,-2.54)
CR_1MM
  round 1.676 hole 1: 1(0,0)
CR_0402
  rect 0.61x0.61 smd: 1(-0.45,0) 2(0.45,0)
CR_0603
  custom 0.813x1.016 smd: 1(-0.648,0) 2(0.648,0)
CR_0805
  custom 1.143x1.448 smd: 1(-0.899,0) 2(0.899,0)
CR_1206
  custom 1.143x1.803 smd: 1(-1.499,0) 2(1.499,0)
DF3EA-2P-2H51
  rect 2.3x3.3 smd: (-5.52,1.15) (5.52,1.15)
  rect 1.2x3.099 smd: 1(1,-4.45) 2(-1,-4.45)
DF3EA-4P-2H51
  rect 2.286x3.2 smd: (-7.52,1.15) (7.52,1.15)
  rect 1.2x3.099 smd: 1(3,-4.45) 2(1,-4.45) 3(-1,-4.45) 4(-3,-4.45)
DF3EA-5P-2H51
  rect 2.286x3.2 smd: (-8.52,1.15) (8.52,1.15)
  rect 1.2x3.099 smd: 1(4,-4.45) 2(2,-4.45) 3(0,-4.45) 4(-2,-4.45) 5(-4,-4.45)
DF3EA-6P-2H51
  rect 2.286x3.2 smd: (-9.52,1.15) (9.52,1.15)
  rect 1.2x3.099 smd: 1(5,-4.45) 2(3,-4.45) 3(1,-4.45) 4(-1,-4.45) 5(-3,-4.45) 6(-5,-4.45)
DF3EA-10P-2H51
  rect 2.286x3.2 smd: (-11.52,1.15) (15.52,1.15)
  rect 1.2x3.099 smd: 1(11,-4.45) 2(9,-4.45) 3(7,-4.45) 4(5,-4.45) 5(3,-4.45) 6(1,-4.45) 7(-1,-4.45) 8(-3,-4.45) 9(-5,-4.45) 10(-7,-4.45)
DF3EA-12P-2H-51
  rect 2.286x3.2 smd: (-15.52,1.15) (15.52,1.15)
  rect 1.2x3.099 smd: 1(11,-4.45) 2(9,-4.45) 3(7,-4.45) 4(5,-4.45) 5(3,-4.45) 6(1,-4.45) 7(-1,-4.45) 8(-3,-4.45) 9(-5,-4.45) 10(-7,-4.45) 11(-9,-4.45) 12(-11,-4.45)
DF3EA-14P-2H51
  rect 2.286x3.2 smd: (-17.52,1.15) (17.52,1.15)
  rect 1.2x3.099 smd: 1(13,-4.45) 2(11,-4.45) 3(9,-4.45) 4(7,-4.45) 5(5,-4.45) 6(3,-4.45) 7(1,-4.45) 8(-1,-4.45) 9(-3,-4.45) 10(-5,-4.45) 11(-7,-4.45) 12(-9,-4.45) 13(-11,-4.45) 14(-13,-4.45)
DF22-2P-7_92DS36
  round 1.397 hole 1.6 unplated: (-7.5,4.35) (7.5,4.35)
  round 2.21 hole 1.5: 1(3.96,-10.85) 2(-3.96,-10.85)
DF22L-2P-7_92DS06
  round 1.397 hole 1.6 unplated: (-7.5,4.35) (7.5,4.35)
  round 2.21 hole 1.5: 1(3.96,-10.85) 2(-3.96,-10.85)
DO-214AB
  rect 2.286x3.556 smd: 1(-3.493,0) 2(3.493,0)
DSX0010A
  oval 0.65x0.25 smd: 1(-1.375,1) 2(-1.375,0.5) 3(-1.375,0) 4(-1.375,-0.5) 5(-1.375,-1) 6(1.375,-1) 7(1.375,-0.5) 8(1.375,0) 9(1.375,0.5) 10(1.375,1)
  custom 1.65x3.4 smd: 11(0,0)
EEE-1JA101P
  rect 4.42x2.108 smd: 1(-4.5,0) 2(4.5,0)
FED
  round 1.016 smd: 1(0,0)
LED0603
  rect 0.8x0.8 smd: 1(-0.75,0) 2(0.75,0)
LQFP100
  oval 1.194x0.292 smd: 1(-7.75,6) 2(-7.75,5.5) 3(-7.75,5) 4(-7.75,4.5) 5(-7.75,4) 6(-7.75,3.5) 7(-7.75,3) 8(-7.75,2.5) 9(-7.75,2) 10(-7.75,1.5) 11(-7.75,1) 12(-7.75,0.5) 13(-7.75,0) 14(-7.75,-0.5) 15(-7.75,-1) 16(-7.75,-1.5) 17(-7.75,-2) 18(-7.75,-2.5) 19(-7.75,-3) 20(-7.75,-3.5) 21(-7.75,-4) 22(-7.75,-4.5) 23(-7.75,-5) 24(-7.75,-5.5) 25(-7.75,-6) 51(7.75,-6) 52(7.75,-5.5) 53(7.75,-5) 54(7.75,-4.5) 55(7.75,-4) 56(7.75,-3.5) 57(7.75,-3) 58(7.75,-2.5) 59(7.75,-2) 60(7.75,-1.5) 61(7.75,-1) 62(7.75,-0.5) 63(7.75,0) 64(7.75,0.5) 65(7.75,1) 66(7.75,1.5) 67(7.75,2) 68(7.75,2.5) 69(7.75,3) 70(7.75,3.5) 71(7.75,4) 72(7.75,4.5) 73(7.75,5) 74(7.75,5.5) 75(7.75,6)
  oval 0.292x1.194 smd: 26(-6,-7.75) 27(-5.5,-7.75) 28(-5,-7.75) 29(-4.5,-7.75) 30(-4,-7.75) 31(-3.5,-7.75) 32(-3,-7.75) 33(-2.5,-7.75) 34(-2,-7.75) 35(-1.5,-7.75) 36(-1,-7.75) 37(-0.5,-7.75) 38(0,-7.75) 39(0.5,-7.75) 40(1,-7.75) 41(1.5,-7.75) 42(2,-7.75) 43(2.5,-7.75) 44(3,-7.75) 45(3.5,-7.75) 46(4,-7.75) 47(4.5,-7.75) 48(5,-7.75) 49(5.5,-7.75) 50(6,-7.75) 76(6,7.75) 77(5.5,7.75) 78(5,7.75) 79(4.5,7.75) 80(4,7.75) 81(3.5,7.75) 82(3,7.75) 83(2.5,7.75) 84(2,7.75) 85(1.5,7.75) 86(1,7.75) 87(0.5,7.75) 88(0,7.75) 89(-0.5,7.75) 90(-1,7.75) 91(-1.5,7.75) 92(-2,7.75) 93(-2.5,7.75) 94(-3,7.75) 95(-3.5,7.75) 96(-4,7.75) 97(-4.5,7.75) 98(-5,7.75) 99(-5.5,7.75) 100(-6,7.75)
ME3220
  rect 1.524x3.048 smd: 1(-1.143,0) 2(1.143,0)
OVAL4X0_5
  oval 5x1.5 hole 4x0.5: 1(0,0)
PTS645SM43SMTR92
  rect 1.549x1.295 smd: 1(-3.975,2.25) 2(3.975,2.25) 3(-3.975,-2.25) 4(3.975,-2.25)
SC-70-6
  oval 0.356x0.711 smd: 1(-0.65,-1.049) 2(0,-1.049) 3(0.65,-1.049) 4(0.65,1.049) 5(0,1.049) 6(-0.65,1.049)
SMD0603
  custom 0.813x0.813 smd: 1(0.787,0) 2(-0.787,0)
SO8
  rect 2.032x0.635 smd: 1(-2.718,1.905) 2(-2.718,0.635) 3(-2.718,-0.635) 4(-2.718,-1.905) 5(2.718,-1.905) 6(2.718,-0.635) 7(2.718,0.635) 8(2.718,1.905)
SO-8
  oval 1.524x0.61 smd: 1(-2.731,1.905) 2(-2.731,0.635) 3(-2.731,-0.635) 4(-2.731,-1.905) 5(2.731,-1.905) 6(2.731,-0.635) 7(2.731,0.635) 8(2.731,1.905)
SOD323
  rect 0.61x0.61 smd: 1(-1.118,0) 2(1.118,0)
SOD923
  rect 0.35x0.25 smd: 1(-0.42,0) 2(0.42,0)
SOD-123F
  rect 1.206x1.27 smd: 1(-1.556,0) 2(1.556,0)
SOIC16W
  oval 0.53x1.98 smd: 1(-4.445,-4.685) 2(-3.175,-4.685) 3(-1.905,-4.685) 4(-0.635,-4.685) 5(0.635,-4.685) 6(1.905,-4.685) 7(3.175,-4.685) 8(4.445,-4.685) 9(4.445,4.685) 10(3.175,4.685) 11(1.905,4.685) 12(0.635,4.685) 13(-0.635,4.685) 14(-1.905,4.685) 15(-3.175,4.685) 16(-4.445,4.685)
SOP-8
  rect 0.65x1.6 smd: 1(-1.905,-2.665) 2(-0.635,-2.665) 3(0.635,-2.665) 4(1.905,-2.665) 5(1.905,2.665) 6(0.635,2.665) 7(-0.635,2.665) 8(-1.905,2.665)
SOT23
  custom 0.762x0.762 smd: 1(-0.94,-1.13) 2(0.94,-1.13) 3(0,1.13)
SOT23-3
  custom 0.762x0.762 smd: 1(-0.95,-1.05) 2(0.95,-1.05) 3(0,1.05)
SOT23-5
  rect 1.05x0.6 smd: 1(1.35,-0.95) 2(1.35,0) 3(1.35,0.95) 4(-1.35,0.95) 5(-1.35,-0.95)
SOT223-3
  rect 0.94x1.905 smd: 1(-2.3,-3.05) 2(0,-3.05) 3(2.3,-3.05)
  rect 3.25x1.9 smd: 4(0,3.05)
SOT323
  rect 0.813x0.889 smd: 1(-0.65,-0.952) 2(0.65,-0.952) 3(0,0.952)
SOT523F
  rect 0.813x0.559 smd: 1(1,0) 2(-1,0)
SOT-23-3
  custom 0.762x0.762 smd: 1(-0.95,-1.05) 2(0.95,-1.05) 3(0,1.05)
SPM10040XT-R18M
  rect 4.7x3.6 smd: 1(-4,0) 2(4,0)
THP3_4
  round 7 hole 3.4: 1(0,0)
TSSOP-8
  oval 0.96x0.44 smd: 1(-1.935,0.975) 2(-1.935,0.325) 3(-1.935,-0.325) 4(-1.935,-0.975) 5(1.935,-0.975) 6(1.935,-0.325) 7(1.935,0.325) 8(1.935,0.975)

## Nets
3V: C68.1 C71.1 R75.2 R77.2 R112.2 R113.1 R122.2 TP16.1 U15.17
3V3: C1.1 C2.1 C17.1 C18.1 C19.1 C21.1 C23.1 C24.1 C26.2 C29.2 C30.1 C31.1 C35.1 C36.1 C37.1 C49.1 C51.1 C55.1 C57.1 C60.2 C61.2 C64.1 C65.1 C66.1 C67.1 C79.1 J1.5 J1.9 J20.2 L1.1 L3.1 L10.2 R6.1 R7.1 R14.1 R17.1 R22.1 R24.1 R25.2 R26.1 R29.1 R31.1 R34.2 R42.1 R44.1 R45.1 R46.1 R49.1 R55.1 R60.1 R93.1 R104.1 R110.1 R125.1 R148.1 R149.1 U1.5 U3.8(VCC) U4.8 U5.8 U6.8 U7.1 U8.8(VCC) U9.28 U9.50 U9.73 U9.100 U10.5 U11.1 U12.3(VOUT)
3V3A: C80.1 C83.1 C85.1 C87.1 C91.1 C101.1 C102.1 L10.1 R92.1 R97.1 R103.1 R106.1 R109.1 R117.1 R121.1 R143.1 U2.7 U16.A2 U17.A2 U21.7 U22.A2 U23.A2
3V3ISO: C34.1 C38.1 R56.2 R57.2 R58.2 R69.2 U7.16(VISO)
3V3ISOSTP: C56.1 C58.1 U11.16(VISO)
3V7: CBIAS1.1 CFF1.1 COUT1.1 L9.2 R79.1 RFBT1.1 U14.5
24VDIG: CIN1.1 CIN_1.1 CINX1.1 J9.1 R62.1 U14.7 U14.8(VIN)
24VHTR: C41.1 C44.1 C69.1 C70.1 C72.1 C77.1 C78.1 C82.1 C95.1 C97.1 C98.1 C104.2 D5.1(C) D12.1(K) D14.1 ISO4.4 J6.1 J21.5 L2.1 L16.2 Q5.2(S) Q6.2(S) R37.1 R38.1 R137.1 U13.27 U15.2 U15.12 U15.16(VSB#16) U15.26 U18.7 U18.8 U19.7 U19.8 U20.7 U20.8
AGND: C11.2 C12.1 C80.2 C83.2 C84.2 C85.2 C86.2 C87.2 C89.2 C90.2 C91.2 C92.2 C93.2 C99.2 C100.2 C101.2 C102.2 C103.2 C105.2 C106.2 C108.1 C109.2 C114.2 D6.2 D7.2 D8.2 D16.2 D17.2 Q9.2(S) Q10.2(S) R13.2 R85.2 R86.1 R91.2 R100.1 R102.2 R107.2 R108.2 R111.2 R114.2 R115.1 R124.2 R129.1 R134.2 R135.1 R139.2 R144.2 R145.2 U2.2 U2.3 U9.19(VSSA) U16.C2 U17.C2 U21.2 U21.3 U22.C2 U23.C2
GND_EARTH: C3.1 C4.1 C6.1 C7.1 C8.1 C9.1 C20.1 C22.1 C42.1 C48.1 C50.1 C75.1 C76.1 C88.1 C107.1 C111.1 C112.1 C113.1 C115.1 C117.1 C118.1 MH1.1 MH2.1 MH3.1 MH4.1 MH5.1 MH6.1 MH7.1 MH8.1 MH9.1 MH10.1 MH11.1 MH12.1 MH13.1 MH14.1 R18.2
GNDDIG: C1.2 C2.2 C3.2 C4.2 C5.1 C6.2 C8.2 C9.2 C13.2 C14.2 C15.2 C16.2 C17.2 C18.2 C19.2 C20.2 C21.2 C23.2 C24.2 C25.2 C26.1 C27.2 C28.1 C29.1 C30.2 C31.2 C32.2 C33.1 C35.2 C36.2 C37.2 C39.2 C40.2 C45.2 C46.2 C47.1 C48.2 C49.2 C51.2 C52.1 C53.2 C54.2 C55.2 C57.2 C59.2 C60.1 C61.1 C62.2 C63.2 C64.2 C65.2 C66.2 C67.2 C75.2 C79.2 C111.2 C116.1 C117.2 CBIAS1.2 CIN1.2 CIN_1.2 CINX1.2 COUT1.2 CVCC1.2 D4.2 ISO1.2 ISO2.2 ISO4.2 J1.2 J1.4 J2.7 J9.2 J9.5 J9.9 J10.3 J11.5 J20.5 J21.3 J22.3 J22.4 Q1.2(S) Q2.2(S) Q3.2(S) R1.2 R3.1 R4.1 R5.1 R9.2 R10.2 R18.1 R27.2 R32.2 R51.2 R59.2 R63.2 R86.2 R118.1 RFBB1.2 SW1.1 SW2.3 SW2.4 U1.2 U3.4 U3.5 U3.6 U3.7 U4.1 U4.2 U4.3 U4.4 U4.7(WP) U5.5 U6.5 U7.2 U7.8 U8.5 U9.20 U9.27 U9.49 U9.74 U9.99 U10.2 U11.2 U11.8 U12.2 U12.4 U14.9 U14.10 U14.11 Y1.2 Y1.4
GNDHTR: C7.2 C22.2 C34.2 C38.2 C41.2 C42.2 C43.2 C44.2 C50.2 C56.2 C58.2 C68.2 C69.2 C70.2 C71.2 C72.2 C73.1 C74.1 C76.2 C78.2 C82.2 C88.2 C94.2 C95.2 C96.2 C97.2 C98.2 C107.2 C112.2 C113.2 C115.2 C118.2 D5.2 D13.2 ISO1.3(EMITTER) ISO2.3(EMITTER) ISO3.3(EMITTER) J6.2 J22.5 Q4.1 Q4.2 Q4.3(S#3) Q7.1 Q7.2 Q7.3(S#3) Q11.2(SOURCE) R28.2 R33.2 R48.2 R50.2 R68.2 R71.2 R81.2 R98.2 R99.2 R132.2 R136.2 R147.2 U7.9 U7.15 U11.9 U11.15 U13.26 U13.41 U15.9 U15.13 U15.21 U15.27 U15.29
1: U14.6
4: CVCC1.1 U14.3
7: CFF1.2 RFBB1.1 RFBT1.2 U14.4
8: CBOOT1.1 U14.2
10: CBOOT1.2 L9.1 U14.1
ADC_IN5: C62.1 R59.1 R60.2 TP12.1 U9.30
ADC_IN6: C63.1 D4.1(CATHODE) R62.2 R63.1 TP11.1 U9.31
BLDC_U: J22.13 L14.2 U13.33
BLDC_V: J22.12 L15.2 U13.36
BLDC_W: J22.11 L13.2 U13.39
CUSHION1_OVRTMP: D11.2 R131.2 TP23.1 TP24.1 U23.A1
CUSHION2_OVRTMP: D10.2 R120.2 TP21.1 TP22.1 U23.A3(OUT)
DOOR_OPEN: C5.2 R8.2 TP7.1 U9.57
FAULT: R67.1 U7.12
HEATER1OVRTMP: D18.2 TP27.1 U2.6
HEATER2OVRTMP: D15.2 TP25.1 U21.6
HEATER_EN: J9.3 U1.3
I2C2_SCL: R26.2 TP1.1 U3.2 U4.6 U9.47
I2C2_SDA: R29.2 TP2.1 U3.1 U4.5 U9.48
LED1_B: R11.1 U9.42
LED1_G: R2.1 U9.41
LED1_R: R12.1 U9.77
LINEAR_3V_REG: C96.1 R122.1 U15.6
LINEAR_FAULT: R74.1
LOCK: R66.1 U7.11
MOT_EN: R72.2 U7.14
MOT_PWM: R64.2 U7.13
NRST: C59.1 J11.4 R52.2 R54.2 R55.2 TP8.1 U9.14
OSC_IN: C39.1 U9.12 Y1.3
OSC_OUT: C40.1 U9.13 Y1.1
RS485A: J9.4 R39.2 U8.6
RS485B: J9.6 R39.1 U8.7
SN1: J9.8 R49.2 U9.63
SN2: J9.10 R45.2 U9.64
SN3: J9.12 R42.2 U9.65
STEP1A: J22.6 L11.2
STEP1B: J22.9 L8.2 L12.2
STEP2A: J22.7 L4.2 L6.2
STEP2B: J22.8 L5.2 L7.2
SYS_SWCLK: J11.3 U9.76
SYS_SWDIO: J11.2 U9.72
UART1_RX: J10.1 U9.69
UART1_TX: J10.2 U9.68
UART2_DE: TP4.1 U8.2 U8.3 U9.85
UART2_RX: TP5.1 U8.1 U9.87
UART2_TX: TP3.1 U8.4 U9.86
VREF+: C45.1 C46.1 C47.2 R51.1 R53.2 U9.21
WDOG_OUT: R43.2 U9.10
N00141: C10.2 C11.1 R15.2 U2.1
N00153: C10.1 C12.2 R16.2 U2.8
N00251: Q9.3 R125.2 U1.6
N02951: J22.10 R137.2 TP26.1
N03007: J22.14 R136.1
N03139: L13.1 U19.1 U19.5 U19.6
N03183: U7.4 U9.36
N03195: U7.3 U9.5
N03207: U7.6 U9.52
N03219: U7.5 U9.53
N03297: C77.2 U13.28
N03329: R94.1 U13.38
N03337: R94.2 U19.2
N03467: R99.1 U13.31 U18.3(S2) U19.3(S2) U20.3(S2)
N03507: R88.2 U13.40(WLSG)
N03515: R88.1 U19.4
N03565: L15.1 U20.1 U20.5 U20.6
N03763: R87.1 U13.35
N03771: R87.2 U20.2
N03819: R95.2 U13.37
N03823: R95.1 U20.4
N03853: R57.1 R67.2 U13.17
N03857: R58.1 R66.2 U13.18
N03861: R56.1 R65.2 U13.16
N03865: R69.1 R72.1 U13.22
N03919: R90.1 U13.32
N03927: L14.1 U18.1 U18.5 U18.6
N03961: R89.2 U13.34
N04069: R65.1 TP13.1
N04169: R90.2 U18.2
N04285: R89.1 U18.4
N04297: R68.1 U13.21
N04353: C116.2 R150.2 TP28.1 U9.51
N04379: R64.1 U13.19
N04461: R61.2 TP9.1
N04465: R61.1 U13.20
N04535: C81.1 U13.30
N04543: C81.2 U13.29
N04691: C73.2 R73.2 R78.2 R80.2 R83.2 R84.2 R96.2 U13.24
N04741: C74.2 U13.25
N04867: TP10.1 U13.7
N06858: C16.1 R23.1 U9.24
N06862: C13.1 R21.1 U9.23
N07111: R19.1 U9.3
N07115: R20.1 U9.2
N07679: L6.1 R78.1 U13.5
N07702: L7.1 R80.1 U13.3
N07711: L8.1 R83.1 U13.1
N08127: R130.2 TP15.1 U9.26 U22.A3(OUT)
N08134: R119.2 TP14.1 U9.25 U22.A1
N08310: R96.1 R98.1 U13.2
N08315: R81.1 R84.1 U13.4
N08322: R71.1 R73.1 U13.6
N08375: D3.2 U9.91
N08379: D2.2 U9.90
N08383: D1.2 U9.89
N08593: R31.2 R32.1 SW1.2(NO) U9.94
N09057: C25.1 C27.1 C28.2 R27.1 R34.1 U9.75
N09211: C32.1 C33.2 U9.6
N09841: U1.1 U9.1
N10657: C52.2 C53.1 C54.1 L3.2 R53.1 U9.22
N11005: J21.2 R104.2 U9.59
N11017: J21.1 R93.2 U9.60
N11029: R140.1 U9.58
N11039: J20.4 U9.40
N11728: R101.2 TP17.1 U9.29 U16.A1
N12025: J9.7 Q10.1 R54.1 R129.2
N21912: J5.2 R13.1 R15.1
N24761: J4.2 R142.1 R144.1
N25940: J5.1 R16.1
N26214: J4.3 R141.1
N26222: C92.1 D6.1 J3.5 R105.1 R109.2 R116.1
N26226: C93.1 J3.4 R105.2 R107.1 U23.B3
N26230: C114.1 D16.1 J3.3 R143.2
N26234: C105.1 J3.2 R134.1 U22.C3
N28734: C14.1 C15.1 J2.10 L1.2
N28741: J2.9 R17.2 U9.92
N28753: J2.8 R14.2 U9.93
N28904: C100.1 D17.1 J2.6 R121.2 R128.1 R138.1
N28923: C106.1 J2.5 R128.2 R139.1 U23.B1
N28927: C99.1 D8.1 J2.4 R117.2
N28931: C103.1 J2.3 R124.1 U22.C1
N28935: C90.1 D7.1 J2.2 R106.2
N28947: C89.1 J2.1 R108.1 U16.C1
N16699484: Q8.5 Q8.6 Q8.7 Q8.8 U5.1 U5.2 U6.1 U6.2
N16699492: R22.2 U5.6
N16699570: R21.2 U5.7(VIOUT)
N16699680: Q5.1 R36.1 R38.2
N16699822: Q4.4 R28.1 R30.2
N16700233: ISO1.4 R36.2
N16700408: J7.2 U5.3 U5.4
N16700412: J7.1 Q4.5 Q4.6 Q4.7 Q4.8
N16700500: ISO1.1 R20.2
N16701089: J8.2 U6.3 U6.4
N16701203: Q8.4 R40.1 R47.2
N16701241: C43.1 L2.2 Q8.1 Q8.2 Q8.3(S#3) R47.1
N16701470: TP19.1 U2.5(SENSE) U17.A1 U17.B1
N16701574: ISO3.4 R40.2
N16701626: ISO3.2 U1.4(Y)
N16701871: C86.1 R91.1 R92.2 U17.C1
N16702518: R24.2 U6.6
N16702596: R23.2 U6.7(VIOUT)
N16702610: C108.2 C110.1 R141.2 U21.8
N16702672: C109.1 C110.2 R142.2 U21.1
N16702706: Q6.1 R35.1 R37.2
N16702805: J1.6 J1.10 Q2.3
N16702810: TP18.1 U17.A3(OUT) U17.B3 U21.5(SENSE)
N16702820: J1.7 J1.11 Q3.3
N16702829: J1.8 J1.12 Q1.3
N16702848: ISO2.4 R35.2
N16702874: Q7.4 R41.2 R48.1
N16702882: ISO2.1 R19.2
N16702898: C84.1 R102.1 R103.2 U17.C3
N16704904: R79.2 U12.1
N16705294: D9.1(K) D10.1(K) D11.1(K) D15.1(K) D18.1(K) Q9.1 R111.1
N16705705: J22.2 R149.2 R150.1
N16707064: J1.3 R6.2 R8.1
N16707078: J1.1 R7.2
N16707091: R115.2 R119.1 U22.B1
N16709245: R130.1 R135.2 U22.B3
N16712120: R100.2 R101.1 U16.B1
N16718352: R131.1 R138.2 R145.1 U23.C1
N16719360: R114.1 R116.2 R120.1 U23.C3
N16723282: U9.43 U11.3
N16723286: U9.46 U11.5
N16723290: U9.44 U11.4
N16723294: U9.45 U11.6
N16723767: D12.2 J21.6 Q11.3
N16723791: ISO4.1 R140.2
N16723823: ISO4.3(EMITTER) R146.1
N16726035: Q11.1 R146.2 R147.1
N16726294: J21.4 R118.2
N16727052: D9.2 Q10.3 R110.2 TP20.1
N16729180: J8.1 Q7.5 Q7.6 Q7.7 Q7.8
N16737422: R46.2 SW2.1 SW2.2 U10.3
N16753588: Q2.1 R9.1 R12.2
N16753702: Q1.1 R1.1 R2.2
N16753788: Q3.1 R10.1 R11.2
N16777910: C104.1 D14.2 U15.11
N16777990: D14.3(CA) U15.10
N16778191: L16.1 R133.1
N16778227: R126.2 U15.8
N16778239: R127.2 U15.7
N16778244: C94.1 D13.1(C) R132.1 R133.2 U15.5
N16778256: R70.2 U15.25
N16778320: R113.2 U15.4
N16778380: R74.2 R75.1 U15.24
N16778382: R76.2 R77.1 U15.22
N16778384: R112.1 R123.2 U15.3
N16778408: U11.14 U15.23
N16778412: U11.13 U15.19
N16778427: U11.12 U15.20
N16778438: U11.11 U15.18
N16781063: R50.1 U11.10
N16781173: L11.1 U15.1
N16781178: L4.1 U15.28
N16781188: L12.1 U15.14
N16781225: L5.1 U15.15
N16817672: J11.1 R44.2
N16831040: J20.3 U9.39
N166997121: Q5.3 R30.1
N167015059: R33.1 U7.10
N167015860: ISO3.1 R25.1
N167027381: Q6.3 R41.1
N167101880: J22.1 R148.2
N167121040: R97.2 U16.C3
N167121041: R85.1 U16.B3
N167121043: R82.1 U16.A3(OUT)
N167338510: R52.1 U10.1
N167338513: R43.1 TP6.1 U10.4(WDI)
N167733811: D3.1(K) R3.2
N167745561: D2.1(K) R5.2
N167745821: D1.1(K) R4.2

Pads without a net: D6 3; D7 3; D8 3; D16 3; D17 3; FED1 1; FED2 1; FED3 1; FED4 1; J3 1; J4 1 4; J9 11; J20 1 6; R70 1; R76 1; R82 2; R123 1; R126 1; R127 1; U2 4; U3 3; U7 7; U9 4 7 8 9 11 15 16 17 18 32 33 34 35 37 38 54 55 56 61 62 66 67 70 71 78 79 80 81 82 83 84 88 95 96 97 98; U11 7; U13 8 9 10 11 12 13 14 15 23; U21 4

## Via types
v1: diameter 0.508, hole 0.254, TOP to BOTTOM, 637 vias
v2: diameter 0.61, hole 0.305, TOP to BOTTOM, 8 vias
v3: diameter 0.457, hole 0.254, TOP to BOTTOM, 1 via

## Routing (per net, layer and track width the routed paths; a pad name or vN(x,y) marks a point on that pad's centre or on a via; arc(x,y) is an arc through that point)
3V: length 12.6
  TOP w0.254: R77.2 v1(72.15,31.13) 71.67,31.62 C68.1 ; v1(75.59,25.51) 74.83,26.27 74.83,26.43 74.72,26.53 U15.17 74.72,29.18 74.17,29.74 C71.1 ; R122.2 69.12,16.62 v1(68.96,16.46) ; v1(67.47,19.39) R112.2 R113.1 ; v1(66.63,33.16) 66.35,32.89 TP16.1 65.92,31.66 R75.2
3V3: length 309
  TOP w0.254: v1(90.23,46.98) 90.47,46.74 R44.1 ; U1.5 v1(53.07,59.75) ; U9.28 105.13,35.95 C61.2 105.07,34.84 C64.1 105.07,33.82 C65.1 105.09,33.22 v1(104.61,32.75) ; v1(119.61,27.24) 119.43,27.06 C79.1 119.34,26.29 L10.2 ; C49.1 119.17,38.59 C55.1 117.6,38.05 116.31,38.05 116.13,37.87 U9.50 116.13,36.66 116.42,36.37 117.03,36.37 C60.2 117.1,37.08 v1(116.82,37.37) ; R34.2 v1(120.54,55.73) ; R104.1 v1(11.85,22.31) ; U11.1 82.81,36.54 v1(83.46,35.89) 84.14,36.57 C57.1 85.15,36.63 C51.1 ; R125.1 110.78,16.11 v1(111.29,16.61) ; R93.1 11.68,24.33 v1(11.79,24.22) ; v1(121.19,43.54) 121.19,43.87 120.9,44.16 120.9,44.62 R49.1 120.85,44.7 R45.1 120.85,46.88 R42.1 v1(120.87,48.12) ; R14.1 v1(107.49,63.83) ; C37.1 84.74,47.69 C35.1 84.19,48.21 v1(83.59,47.61) 83.04,48.16 U7.1 ; R26.1 104.3,60.75 v1(103.67,61.38) ; R110.1 115.23,19.96 115.7,19.49 v1(115.7,19.39) ; U10.5 v1(91.13,41.39) ; U12.3 119.13,34.23 v1(119.37,34.48) ; R17.1 v1(107.36,62.67) ; U4.8 112.86,54.74 C23.1 v1(114.6,54.43) ; C17.1 39.8,60.2 v1(39,59.4) 39.29,59.4 40.07,58.62 U6.8 ; 29.37,73.34 30.58,74.55 33.91,74.55 34.49,73.96 34.49,68.93 v1(34.54,68.88) R7.1 ; R24.1 43.62,61.28 v1(43.93,60.97) ; L3.1 95.12,37.18 v1(94.77,37.52) ; U5.8 45.15,57.96 v1(44.7,58.41) 44.7,59.56 45.4,60.25 C18.1 ; U3.8 98.53,58.5 C19.1 v1(97.21,58.07) ; R149.1 v1(19.7,11.94) ; L1.1 v1(101.52,63.55) ; v1(102.81,32.7) 102.69,32.7 102.32,33.07 R60.1 ; U9.73 119.09,49.95 C29.2 v1(119.12,48.92) ; v1(91.48,36.04) 91.72,36.28 R55.1 ; C31.1 120.15,49.92 C30.1 v1(120.14,49.03) ; J20.2 v1(75.16,6.41) ; R29.1 v1(106.15,54.42) ; v1(49.71,60.85) 49.25,61.31 R22.1 ; C36.1 92.72,49.39 U8.8 94.05,49.46 v1(94.26,49.67) ; R148.1 v1(17.66,11.93) ; R25.2 55.85,60.95 v1(56.02,60.78) ; U9.100 104.13,53.32 C26.2 103.47,54.98 C24.1 103.45,56 C21.1 v1(103.44,57.11) ; R46.1 v1(95.27,47.4) ; R31.1 v1(97.23,55.09)
  TOP w0.381: J1.5 29.37,71.28 31.28,69.37 31.28,68.62 30.27,67.6 21.75,67.6 21.37,67.98 21.37,70.08
  TOP w0.508: v1(42.39,69.6) C2.1 42.39,73.31 42.76,73.68 C1.1 ; R6.1 v1(34.54,68.88) ; J1.9 21.37,70.08 ; 29.37,73.34 J1.5
  SIG1 w0.508: v1(94.77,37.52) 97.22,35.08 97.22,29.82 93.99,26.59 93.99,23.77 86.05,15.82 86.05,11.6 84.22,9.77 84.22,4.91 81.77,2.46 16.7,2.46 7.91,11.25 7.91,21.17 9.05,22.31 v1(11.85,22.31)
  SIG1 w0.635: 112.87,19.78 112.46,19.37 112.46,17.78 v1(111.29,16.61) ; 112.87,19.78 112.87,23.56 115.25,25.94 118.31,25.94 v1(119.61,27.24) ; 112.87,19.78 115.31,19.78 v1(115.7,19.39) ; v1(11.79,24.22) 11.79,22.36 v1(11.85,22.31) 11.85,20.01 16.92,14.93 16.92,12.69 17.67,11.94 ; 17.67,11.94 v1(19.7,11.94) ; 17.67,11.94 v1(17.66,11.93)
  SIG2 w0.635: v1(42.39,69.6) 40.31,69.6 39.49,68.79 ; 39.49,68.79 40.88,67.4 42.95,67.4 44.68,65.67 44.68,63.91 43.93,63.16 v1(43.93,60.97) ; 39.49,68.79 34.63,68.79 v1(34.54,68.88)
  vias: v1(118.87,35.11) v1(119.99,35.09)
3V3A: length 22.4
  TOP w0.127: U22.A2 108.04,16.49 C101.1 ; U16.A2 111.83,24.51 C80.1 ; U17.A2 99.04,21.54 v1(98.92,21.43)
  TOP w0.152: U23.A2 119.81,16.16 C102.1
  TOP w0.254: v1(122.5,19.99) 122.39,19.88 121.87,19.88 R109.1 ; R92.1 v1(97.83,24.54) ; R143.1 107.48,13.24 v1(107.71,13.48) ; v1(98.92,21.43) 98.46,20.97 C91.1 ; R121.1 122.88,18.07 122.52,17.72 v1(122.52,17.59) ; U21.7 v1(97.57,16.91) ; v1(97.24,21.2) 97.24,21.55 97.59,21.91 R103.1 ; v1(119.26,16.75) 119.78,16.23 C102.1 ; R117.1 104.94,19.62 v1(105.22,19.9) ; R106.1 113.59,21.19 v1(114.18,21.78) ; U2.7 v1(89.29,60.25) ; C80.1 v1(111.25,25.83) ; C83.1 117.34,23.26 116.99,22.91 v1(116.99,22.87) 117.07,22.95 C85.1 117.88,22.98 C87.1 119.34,23.11 L10.1 ; C101.1 v1(108.05,15.75) ; R97.1 v1(115.15,24.04)
3V3ISO: length 38.7
  TOP w0.254: U7.16 70.15,48.16 C34.1 70.02,47.22 C38.1 69.26,45.81 68.71,45.81 67.65,44.76 67.65,40.24 65.85,38.44 59.17,38.44 57.29,36.56 R56.2 55.78,36.54 R57.2 54.18,36.52 52.7,36.52 R58.2 48.46,36.53 47.8,35.86 47.8,32.32 47.99,32.12 R69.2
3V3ISOSTP: length 3.7
  TOP w0.254: U11.16 70.51,36.54 C58.1 69.08,36.59 C56.1
3V7: length 26.9
  TOP w0.254: 91.51,32.24 91.51,33.22 91.48,33.25 87.94,33.25 87.3,32.61 RFBT1.1 86.42,31.53 CFF1.1
  TOP w0.508: R79.1 108.6,28.92 108.5,29.02 93.34,29.02 ; 92.68,29.68 92.68,27.1 L9.2
24VDIG: length 80.9
  TOP w0.254: 84.39,28.42 84.39,30.97 87.3,33.88 93.52,33.88 95.42,31.98 108.11,31.98 109.04,32.9 109.24,32.9 109.56,33.22 109.56,33.24 109.56,33.25 109.56,33.43 110.12,33.99 R62.1 ; CINX1.1 84.47,27.38 CIN_1.1 82.93,27.37 CIN1.1 ; J9.1 v1(59.77,5.35)
  SIG1 w0.635: v1(59.77,5.35) 59.77,5.73 61.16,7.12 77.04,7.12 77.26,7.35 77.9,7.35 82.79,12.24 82.79,24.41 v1(80.93,26.27)
24VHTR: length 82.8
  TOP w0.254: L16.2 v1(68.91,13.15) ; Q6.2 56.92,52.9 R37.1 56.92,55.04 v1(56.68,55.28) ; U20.7 v1(54.69,15.71) ; v1(55.4,44.53) C41.1 v1(52.55,42.94) ; D14.1 76.03,14.45 C104.2 v1(77.12,14.5) ; ISO4.4 v1(12.82,12.59) ; v1(69.68,30.61) 68.88,29.82 C72.1 ; U18.8 v1(50.56,15.72) ; v1(65.55,22.33) C82.1 67.4,23.54 68.22,22.72 U15.2 ; v1(62.66,55.15) R38.1 62.96,53.79 Q5.2 ; v1(12.13,17.29) 11.91,17.07 D12.1 9.95,16.36 J21.5 ; v1(75.92,23.9) 75.56,23.9 74.72,23.07 U15.12 ; U13.27 49.98,28.29 49.93,28.24 C77.1 49.43,27.81 48.63,27.81 C78.1 48.49,27.81 v1(47.43,27.81) ; U19.7 v1(60.07,15.69) ; C97.1 v1(37.04,18.57) ; C97.1 v1(39.88,16.67) ; C97.1 v1(39.88,20.38) ; U20.8 v1(55.96,15.73) ; U18.7 v1(49.29,15.69) ; U19.8 v1(61.34,15.77)
  TOP w0.381: C69.1 v1(33.98,24.14) ; C69.1 v1(33.98,30.43) ; C69.1 v1(31.43,27.4) ; C69.1 v1(36.09,27.4) ; D5.1 v1(45.77,26.07) ; D5.1 v1(40.59,26.07) ; D5.1 v1(43.35,28.2) ; D5.1 v1(43.35,23.36)
  TOP w0.508: v1(75.73,26.25) 75.37,26.6 U15.16 75.37,29.08 76,29.7 C70.1 ; R137.1 v1(44.11,16.2) ; U15.26 68.87,29.75 C72.1 ; C98.1 64.81,20.83 v1(65.17,21.19) ; U15.12 C95.1
  PWR w0.508: 17.35,43.96 J6.1 ; J6.1 18.7,42.61 ; J6.1 18.7,45.31 ; J6.1 20.05,43.96
  vias: v1(29.99,43.76) v1(31.67,42.53) v1(33.78,44.8) v1(33.86,43.83) v1(33.9,42.84) v1(34.28,41.88) v1(35.29,47.22) v1(36.31,42.2) v1(37.02,47.28) v1(37.02,42.19) v1(38.06,47.17) v1(38.48,42.2) v1(39.83,42.33) v1(39.86,47.2) v1(40.02,46.3) v1(40.13,43.81) v1(40.24,44.8)
AGND: length 75.5
  TOP w0.127: v1(122.46,16.71) 122.46,16.48 122.15,16.16 U23.C2
  TOP w0.152: U16.C2 v1(111.83,22.56) ; U17.C2 v1(99.04,23.59) ; U22.C2 v1(105.47,16.49)
  TOP w0.254: v1(108.86,17.43) 108.8,17.49 C101.2 ; R85.2 v1(115.23,24.94) ; D17.2 119.64,14.86 v1(118.82,14.86) ; C11.2 86.03,62.77 v1(85.55,62.28) ; v1(124.35,19.77) 124.17,19.77 ; 124.17,19.77 124.17,19.44 123.92,19.19 R114.2 ; 124.17,19.77 123.92,20.02 C93.2 ; C91.2 99.48,20.29 v1(99.37,20.19) ; D6.2 123.19,22.6 123.63,22.6 v1(123.72,22.52) 123.72,21.66 R107.2 ; R145.2 121.07,12.95 v1(120.48,12.95) ; C83.2 v1(116.32,23.44) ; C102.2 119.78,17.51 v1(119.5,17.8) ; C105.2 103.87,15.14 v1(103.33,15.68) C103.2 ; v1(118.22,23.58) 118.39,23.74 R86.1 ; R124.2 v1(103.17,17.12) ; v1(91.69,63.46) 91.21,62.98 C12.1 ; R134.2 103.64,14.18 v1(103.32,13.85) 103.93,13.23 C114.2 ; C99.2 105.03,18.1 v1(105.54,17.59) ; Q9.2 109.54,19.19 v1(108.82,19.91) 109.63,20.72 R108.2 ; U2.3 v1(86.98,58.98) ; C90.2 C89.2 v1(111.31,20.38) ; D7.2 116.48,20.2 v1(116.33,20.05) ; C108.1 v1(95.07,14.42) ; R13.2 v1(83.83,64.01) ; R135.1 v1(107.82,14.17) ; R91.2 101.44,24.61 v1(102.24,24.61) ; R111.2 v1(113.16,19.08) ; v1(122.46,16.71) 122.84,17.09 C100.2 ; C80.2 v1(112.27,25.79) ; U21.3 v1(99.99,18.18) ; R129.1 116.56,15.16 117.17,15.16 v1(117.47,15.46) 117.47,16.15 117.08,16.54 Q10.2 ; D16.2 v1(110.98,13.71) ; R102.2 95.76,22.01 C84.2 v1(94.79,21.99) ; R144.2 102.47,13.91 v1(101.96,14.42) C109.2 ; C92.2 119.55,20.94 C87.2 117.97,21.28 v1(117.85,21.16) C85.2 ; U9.19 v1(103.42,41.95) ; R115.1 106.93,19.94 v1(107.11,20.12) D8.2 ; R100.1 v1(108.7,24.07) ; C86.2 v1(101.45,21.89) ; U21.2 v1(99.89,16.91) ; U2.2 v1(87.01,60.25)
  TOP w0.381: C106.2 123.85,13.83 R139.2 v1(123.77,13.04)
  SIG1 w0.635: v1(102.24,24.61) 98.52,28.32 98.52,33.73 101.68,36.89 101.68,40.22 v1(103.42,41.95)
GND_EARTH: length 115.6
  TOP w0.254: C48.1 125.26,40.11 ; C4.1 97.48,66.29 97.46,66.27 ; C20.1 125.4,56.88 125.46,56.94 ; C88.1 26.06,21.75 ; MH5.1 110.25,65.12 C6.1 ; C3.1 75.99,66.1 ; C8.1 56.06,64.38 56.67,64.99 56.67,65.38 ; 26.57,13.64 26.76,13.84 C107.1 ; 125.41,30.68 125.43,30.66 ; 125.51,28.74 125.5,28.73 C75.1 ; 26.18,25.03 MH8.1 ; 75.83,65.69 MH3.1 ; 120.08,64.98 120,65.05
  TOP w0.381: C118.1 54.17,10.44 54.36,10.63 ; C115.1 50.49,11.71 50.76,11.45 ; C117.1 82.35,10.87 82.16,11.06 ; 92.64,11.69 92.49,11.83 C111.1 ; C113.1 60.02,11.88 59.68,11.54 ; C42.1 26.62,43.65 26.49,43.52 ; C112.1 65.48,11.31 65.57,11.21 ; 82.7,65.33 82.75,65.28 C9.1 ; 26.59,38.54 26.61,38.51 C50.1 ; C7.1 35.04,65.6 ; 37.32,65.44 37.34,65.46 ; C76.1 25.72,28.52 ; C22.1 26.4,55.39
  TOP w0.508: R18.2 79.26,65.65 79.44,65.83
  BOTTOM w0.508: 26.13,22.24 MH8.1 ; MH8.1 26.13,27.73 ; MH8.1 25.14,24.99 ; MH8.1 27.13,24.99 ; 38.29,65.88 MH4.1 ; MH4.1 41.03,66.87 ; MH4.1 43.78,65.88 ; MH4.1 41.03,64.88 ; 41,10.13 MH10.1 ; MH10.1 43.74,11.12 ; MH10.1 41,12.12 ; MH10.1 38.25,11.12 ; 124.88,52 MH7.1 ; MH7.1 125.87,49.26 ; MH7.1 126.86,52 ; MH7.1 125.87,54.74 ; 25.13,52 MH6.1 ; MH6.1 26.12,54.75 ; MH6.1 27.12,52 ; MH6.1 26.12,49.26 ; MH11.1 78.73,11.12 ; MH11.1 75.99,12.12 ; MH11.1 75.99,10.13 ; MH11.1 73.25,11.12 ; 73.3,65.9 MH3.1 ; MH3.1 76.04,64.91 ; MH3.1 78.78,65.9 ; MH3.1 76.04,66.89 ; MH9.1 125.88,27.72 ; MH9.1 124.89,24.98 ; MH9.1 125.88,22.24 ; MH9.1 126.88,24.98 ; 108.25,11.12 MH12.1 ; MH12.1 110.99,12.12 ; MH12.1 110.99,10.13 ; MH12.1 113.74,11.12 ; 108.26,65.87 MH5.1 ; MH5.1 113.74,65.87 ; MH5.1 111,66.86 ; MH5.1 111,64.87
  vias: v1(1.11,65.22) v1(1.14,59.68) v1(1.08,54.46) v1(1.2,23.25) v1(1.23,17.7) v1(1.17,12.49) v1(1.29,45.01) v1(1.32,39.47) v1(1.26,34.25) v1(14.12,78.83) v1(19.61,1.21) v1(19.67,78.86) v1(24.83,1.15) v1(24.88,78.81) v1(28.63,78.83) v1(30.37,1.18) v1(34.18,78.86) v1(34.48,1.33) v1(39.4,78.81) v1(39.7,1.27) v1(45.24,1.3) v1(45.9,78.78) v1(51.45,78.81) v1(53.07,1.27) v1(56.66,78.75) v1(58.29,1.21) v1(61.19,78.71) v1(63.83,1.24) v1(66.74,78.75) v1(68.42,1.21) v1(71.96,78.69) v1(73.63,1.15) v1(79.18,1.18) v1(87.73,1.21) v1(92.94,1.15) v1(98.49,1.18) v1(99.93,78.66) v1(105.47,78.69) v1(106.49,1.39) v1(110.69,78.63) v1(111.71,1.33) v1(117.26,1.36) v1(128.74,36.89) v1(128.68,31.67) v1(128.71,26.13) v1(128.8,64.05) v1(128.83,58.51) v1(128.86,69.27) v1(128.92,52.96) v1(128.86,47.74) v1(128.89,42.2) v1(128.92,21.18) v1(128.86,15.96) v1(128.89,10.42)
